# EAGLE board MicroMod-HDMI-Carrier-Panel (EAGLE 9.6.2), part 1 of 3
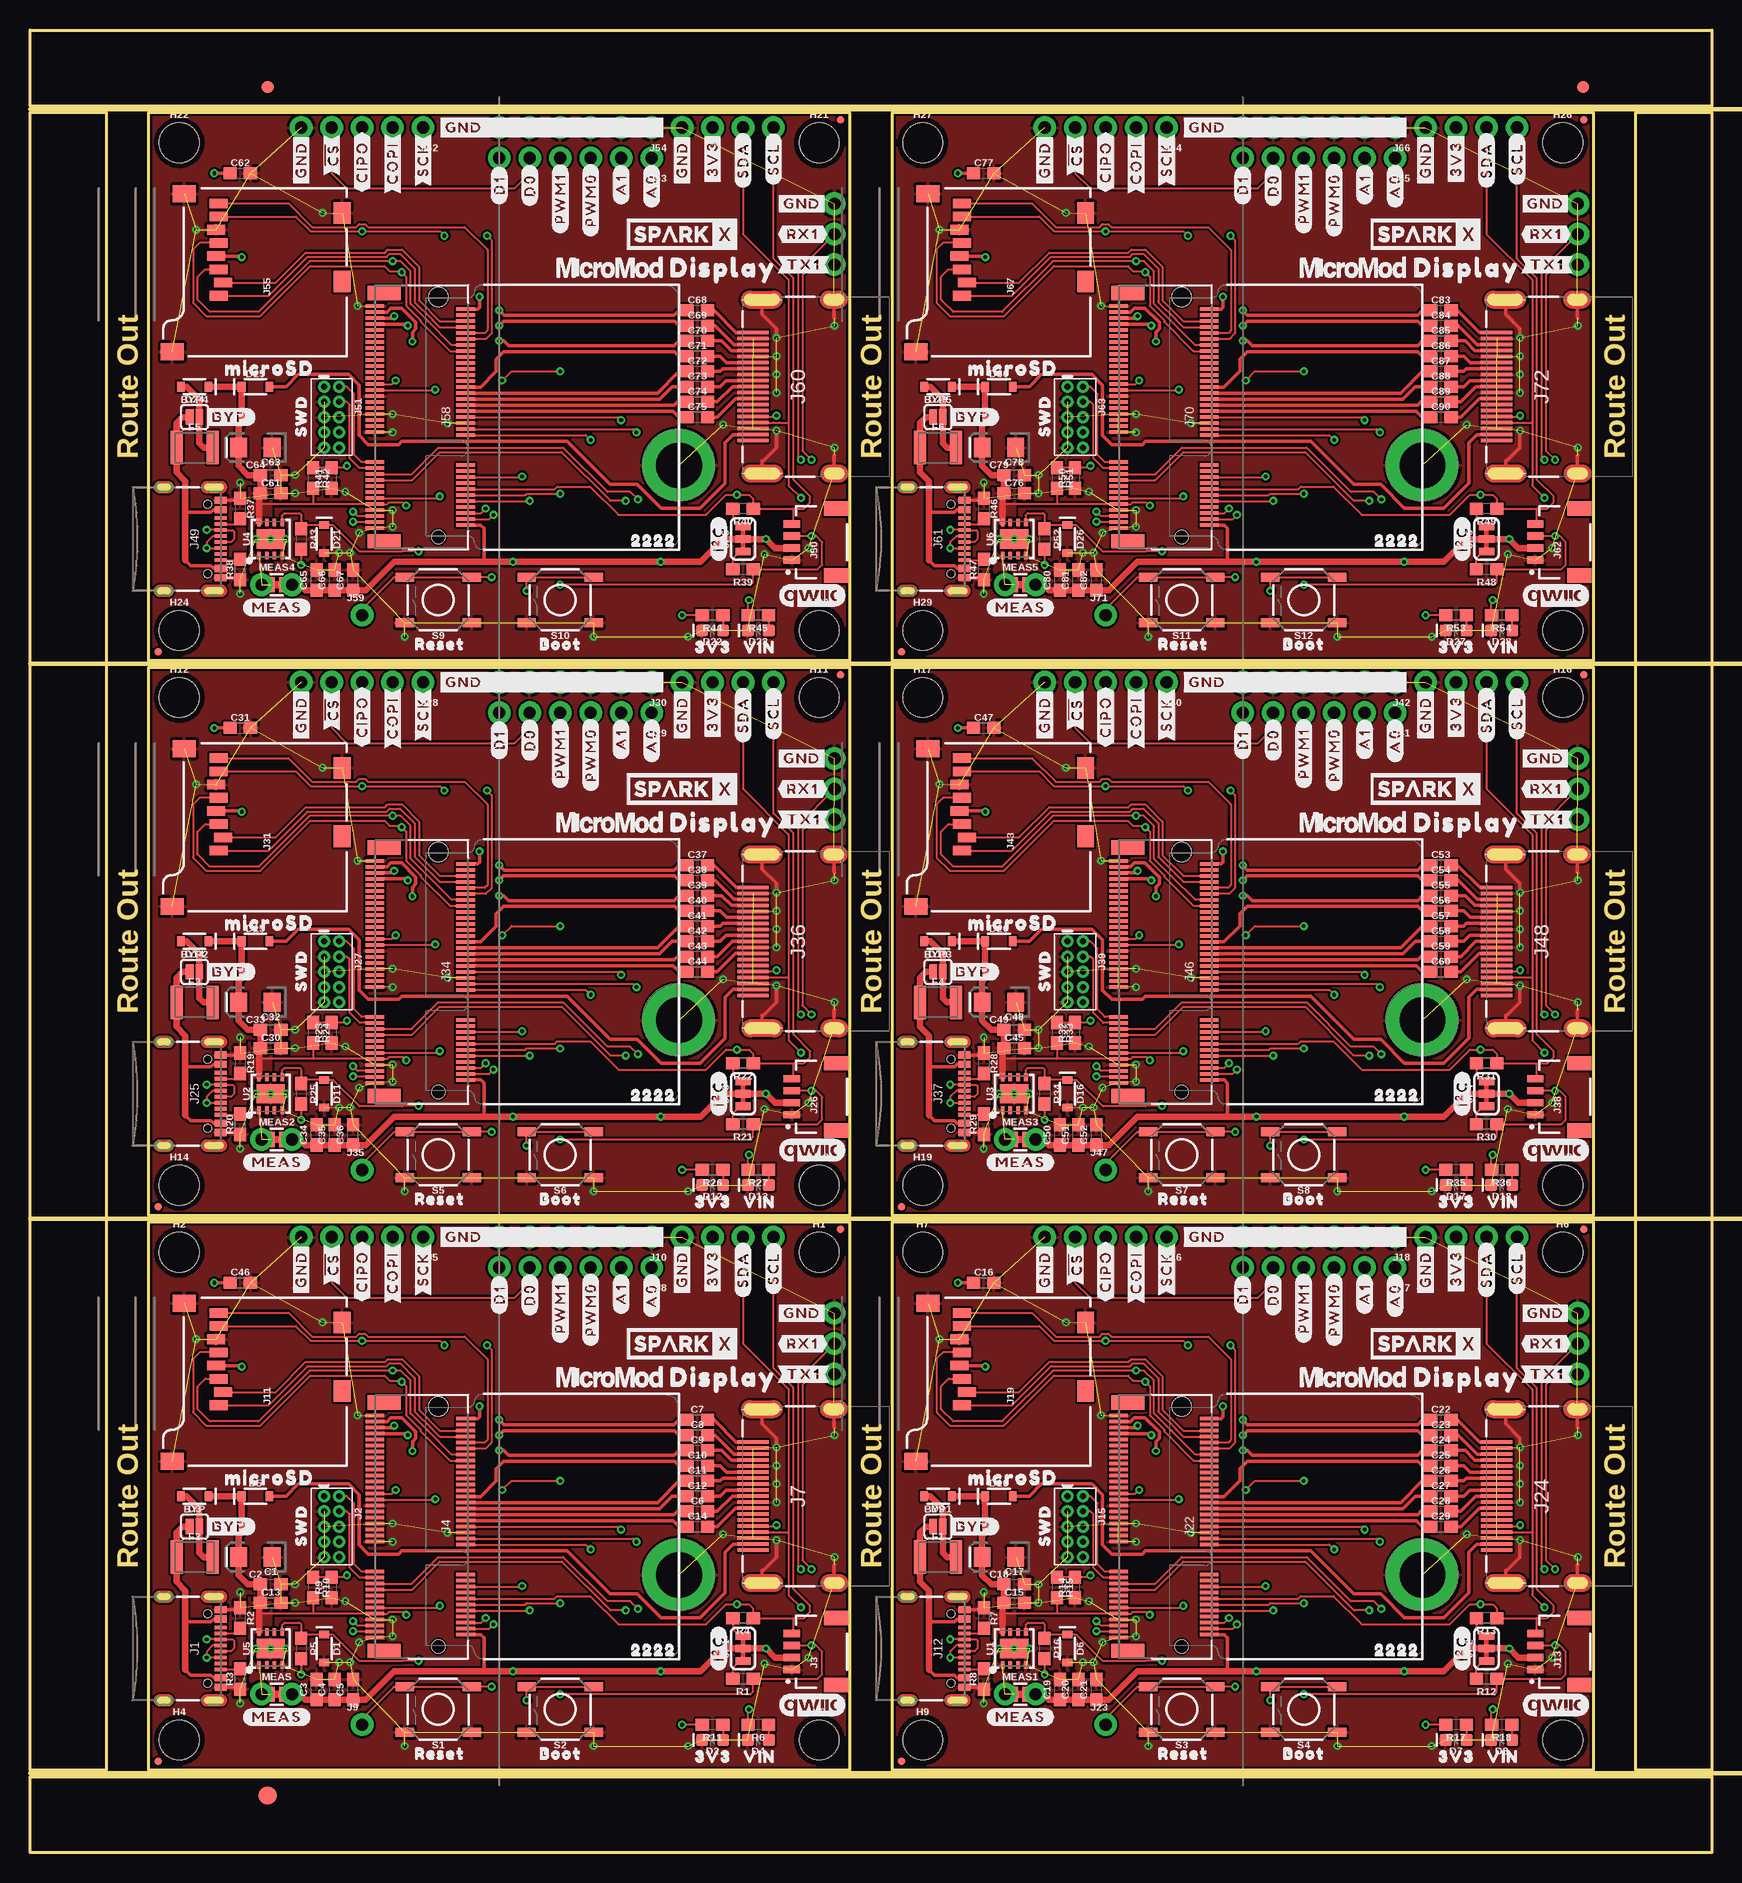
[diagram p0: board, top side]
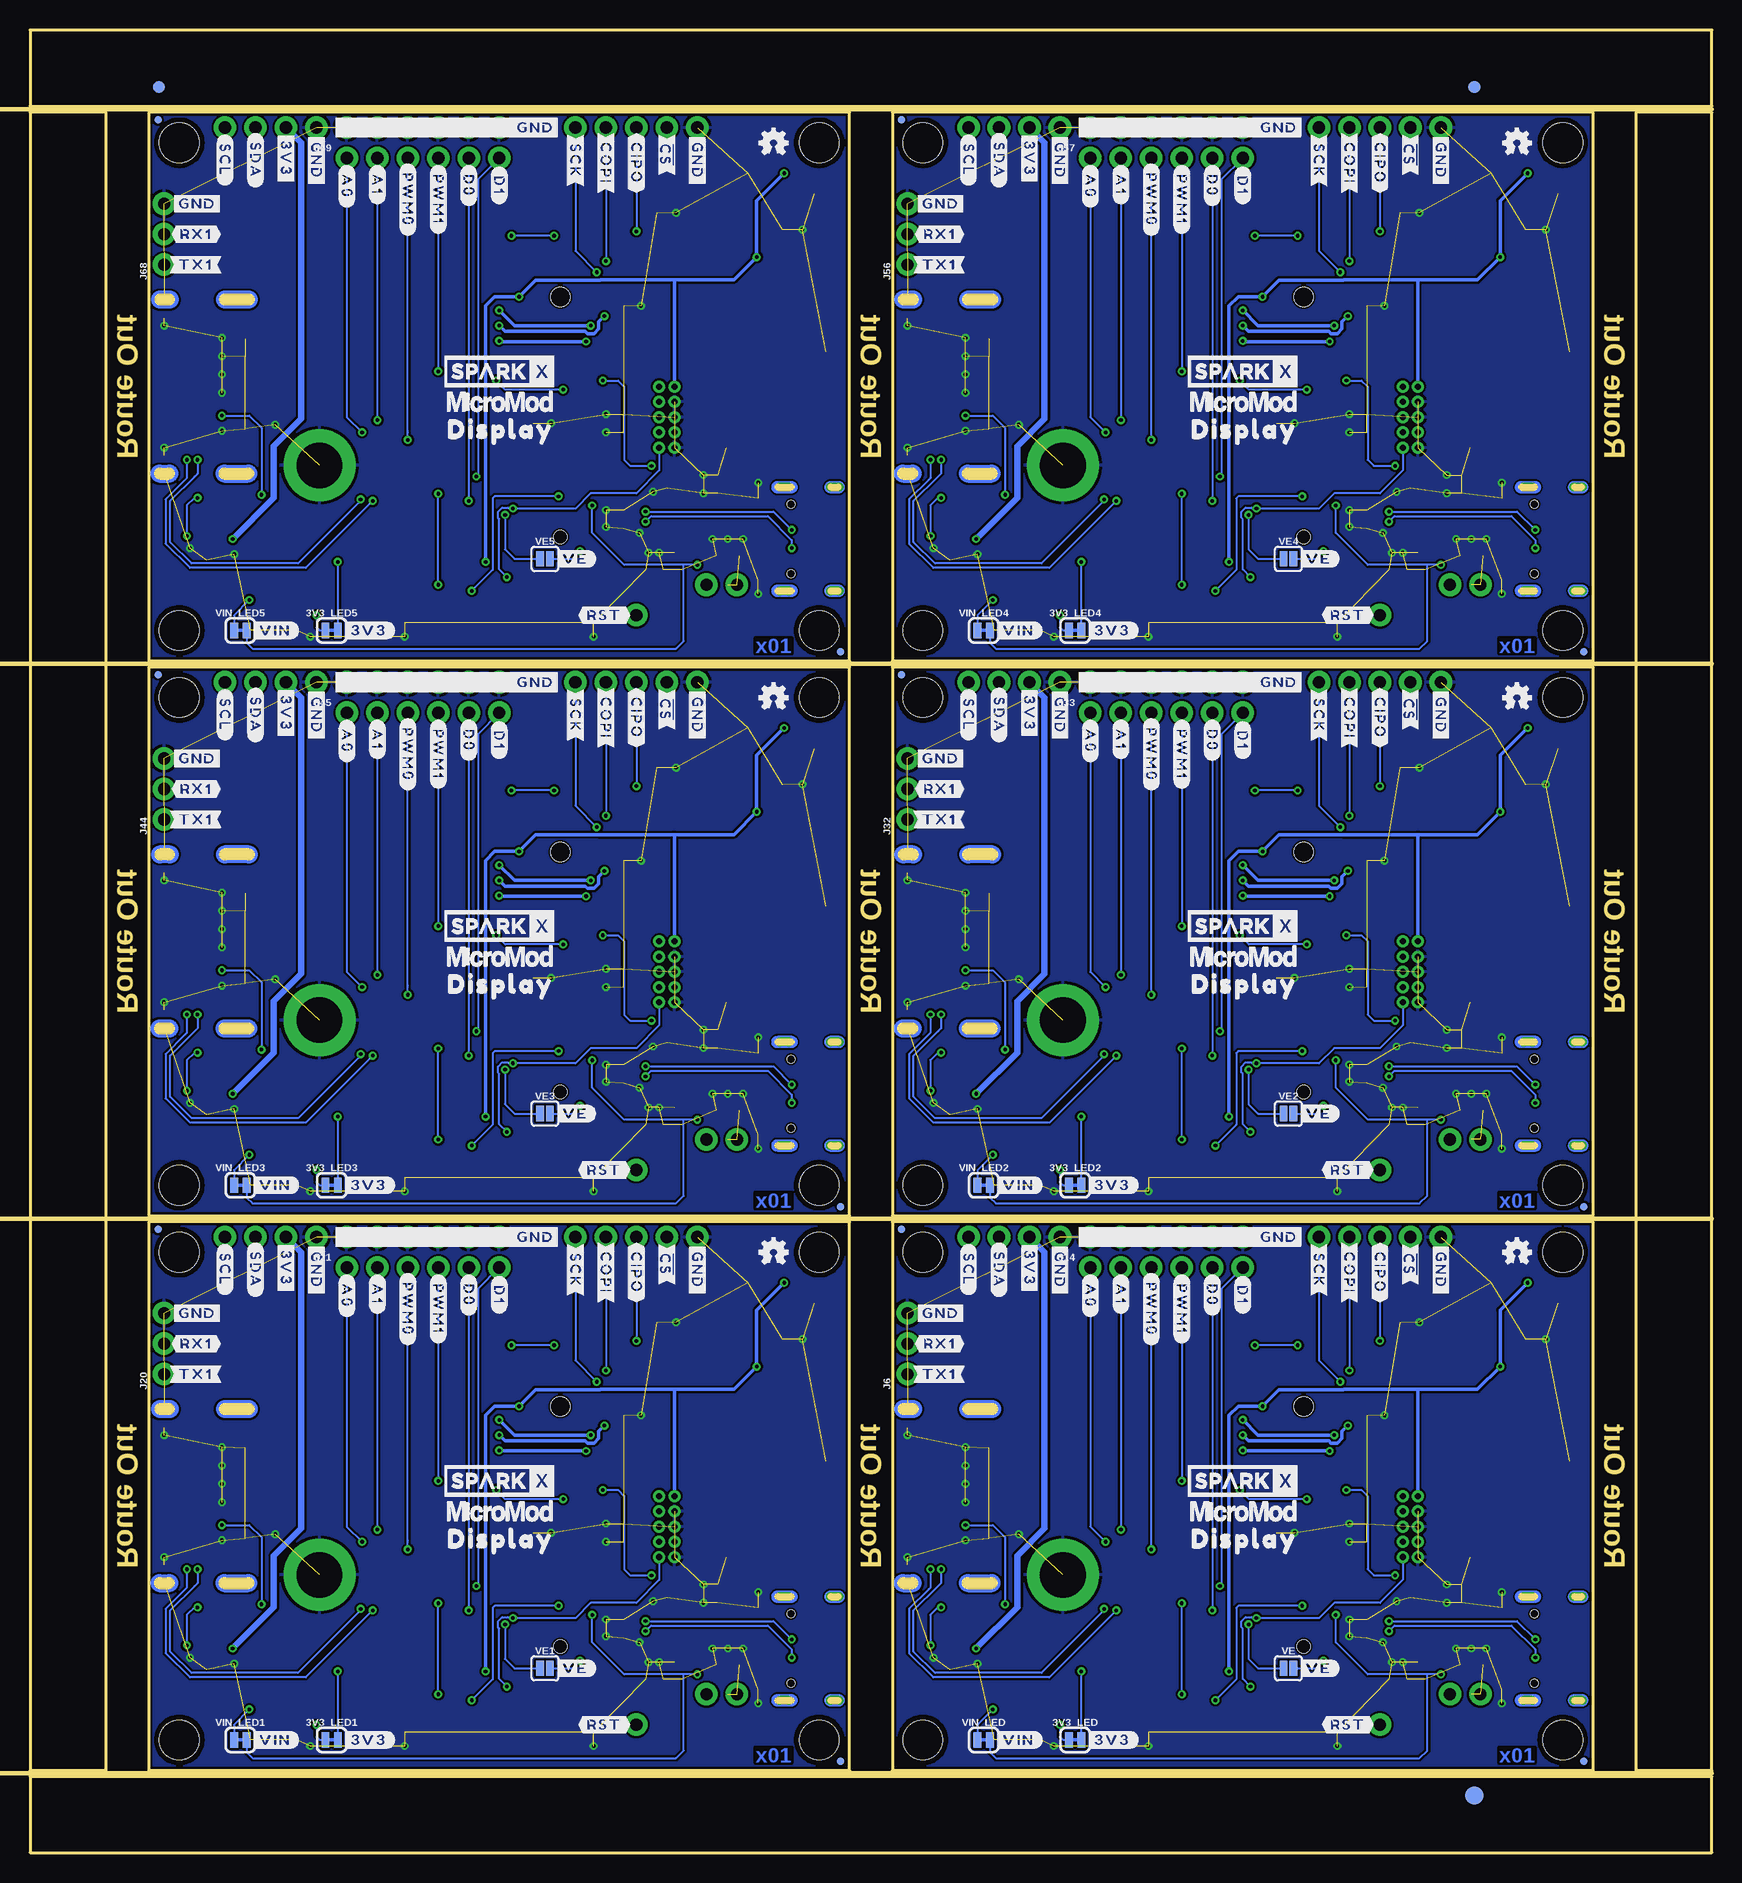
[diagram p1: board, bottom side, seen from below]

Size 140.21 x 151.89 mm. Coordinates in mm from the lower left corner, seen from the top.
Outline: 9.91,6.86 9.91,52.58 68.33,52.58 68.33,6.86 9.91,6.86
Outline: 71.88,6.86 71.88,52.58 130.3,52.58 130.3,6.86 71.88,6.86
Outline: 9.91,53.09 9.91,98.81 68.33,98.81 68.33,53.09 9.91,53.09
Outline: 71.88,53.09 71.88,98.81 130.3,98.81 130.3,53.09 71.88,53.09
Outline: 9.91,99.31 9.91,145.03 68.33,145.03 68.33,99.31 9.91,99.31
Outline: 71.88,99.31 71.88,145.03 130.3,145.03 130.3,99.31 71.88,99.31
Outline: 0,6.35 140.21,6.35 140.21,0 0,0 0,6.35
Outline: 133.86,145.03 140.21,145.03 140.21,6.86 133.86,6.86 133.86,145.03
Outline: 0,151.89 140.21,151.89 140.21,145.54 0,145.54 0,151.89
Outline: 0,145.03 6.35,145.03 6.35,6.86 0,6.86 0,145.03
Copper layers (1*16): Top 0.035mm / dielectric 1.5mm / Bottom 0.035mm
Design rules "MicroMod-HDMI-Carrier": minimum track width 7mil, minimum drill 12mil, track to track 7mil, track to pad 7mil, pad to pad 7mil, via to via 7mil, smd to smd 7mil, copper to edge 7mil, drill to drill 7mil, minimum pad ring 7mil, minimum via ring 7mil, stop-mask expansion 4mil, vias tented up to drill 25mil, thermal gap 10mil
Net classes: 0 default: width 0 mm, drill 0 mm
Milling: 4 lines

## Footprints (pad centres in the part's own frame; a part is rotated, then mirrored left to right if it is on the bottom)
SMT-JUMPER_2_NC_TRACE_SILK = smd 0.66 x 1.27: 1 -0.521,0; 2 0.521,0
SMT-JUMPER_2_NO_SILK = smd 0.635 x 1.27: 1 -0.406,0; 2 0.406,0
0603 = smd 1.1 x 1: 1 -0.85,0; 2 0.85,0
EIA3216 = smd 1.4 x 1.6: + 1.4,0; - -1.4,0
SOD-323 = smd 0.63 x 0.83: A 1.15,0; C -1.15,0
LED-0603 = smd 1 x 1: A -0.877,0; C 0.877,0
FIDUCIAL-1X2 = smd 1 x 1: 1 0,0
FIDUCIAL-1.5X3 = smd 1.5 x 1.5: 1 0,0
1210 = smd 1 x 2.8: 1 -1.5,0; 2 1.5,0
FIDUCIAL-MICRO = smd 0.635 x 0.635: 1 0,0
STAND-OFF = hole 3.302: 0,0
STAND-OFF-REFLOW-M2.5 = drill 3.8 pad 6: 1 0,0
USB-C-16P-2LAYER-PADS = smd 0.3 x 1: A5 -1.25,-0.34; A6 -0.25,-0.34; A7 0.25,-0.34; A8 1.25,-0.34; B5 1.75,-0.34; B6 0.75,-0.34; B7 -0.75,-0.34; B8 -1.75,-0.34 | smd 0.6 x 1: GND -3.225,-0.34; GND2 3.225,-0.34; VBUS1 -2.45,-0.34; VBUS2 2.45,-0.34 | drill 0.4 pad 0.6 long: SHLD1 -4.318,-0.915; SHLD2 4.318,-0.915; SHLD3 -4.318,-5.095; SHLD4 4.318,-5.095 | hole 0.65: -2.89,-1.445; 2.89,-1.445
2X5-PTH-1.27MM = drill 0.508 pad 1: 1 -2.54,-0.635; 2 -2.54,0.635; 3 -1.27,-0.635; 4 -1.27,0.635; 5 0,-0.635; 6 0,0.635; 7 1.27,-0.635; 8 1.27,0.635; 9 2.54,-0.635; 10 2.54,0.635
JST04_1MM_RA = smd 0.6 x 1.35: 1 -1.5,0; 2 -0.5,0; 3 0.5,0; 4 1.5,0 | smd 1.2 x 2: NC1 2.8,-3.675; NC2 -2.8,-3.675
M.2-CONNECTOR-E = smd 0.3 x 1.55: 1 9.25,-5.275; 2 9,2.275; 3 8.75,-5.275; 4 8.5,2.275; 5 8.25,-5.275; 6 8,2.275; 7 7.75,-5.275; 8 7.5,2.275; 9 7.25,-5.275; 10 7,2.275; 11 6.75,-5.275; 12 6.5,2.275; 13 6.25,-5.275; 14 6,2.275; 15 5.75,-5.275; 16 5.5,2.275; 17 5.25,-5.275; 18 5,2.275; 19 4.75,-5.275; 20 4.5,2.275; 21 4.25,-5.275; 22 4,2.275; 23 3.75,-5.275; 32 1.5,2.275; 33 1.25,-5.275; 34 1,2.275; 35 0.75,-5.275; 36 0.5,2.275; 37 0.25,-5.275; 38 0,2.275; 39 -0.25,-5.275; 40 -0.5,2.275; 41 -0.75,-5.275; 42 -1,2.275; 43 -1.25,-5.275; 44 -1.5,2.275; 45 -1.75,-5.275; 46 -2,2.275; 47 -2.25,-5.275; 48 -2.5,2.275; 49 -2.75,-5.275; 50 -3,2.275; 51 -3.25,-5.275; 52 -3.5,2.275; 53 -3.75,-5.275; 54 -4,2.275; 55 -4.25,-5.275; 56 -4.5,2.275; 57 -4.75,-5.275; 58 -5,2.275; 59 -5.25,-5.275; 60 -5.5,2.275; 61 -5.75,-5.275; 62 -6,2.275; 63 -6.25,-5.275; 64 -6.5,2.275; 65 -6.75,-5.275; 66 -7,2.275; 67 -7.25,-5.275; 68 -7.5,2.275; 69 -7.75,-5.275; 70 -8,2.275; 71 -8.25,-5.275; 72 -8.5,2.275; 73 -8.75,-5.275; 74 -9,2.275; 75 -9.25,-5.275 | smd 1.2 x 2.75: A1 10.35,-4.5; A2 -10.35,-4.5 | hole 1.1: 10,0 | hole 1.6: -10,0
1X05_NO_SILK = drill 1.016 pad 1.88: 1 0,0; 2 2.54,0; 3 5.08,0; 4 7.62,0; 5 10.16,0
1X03_NO_SILK = drill 1.016 pad 1.88: 1 0,0; 2 2.54,0; 3 5.08,0
MOLEX_HDMI_208658-1051 = smd 0.3 x 2.6: 1 4.5,4.235; 2 4,4.235; 3 3.5,4.235; 4 3,4.235; 5 2.5,4.235; 6 2,4.235; 7 1.5,4.235; 8 1,4.235; 9 0.5,4.235; 10 0,4.235; 11 -0.5,4.235; 12 -1,4.235; 13 -1.5,4.235; 14 -2,4.235; 15 -2.5,4.235; 16 -3,4.235; 17 -3.5,4.235; 18 -4,4.235; 19 -4.5,4.235 | drill 0.4 long: MH1 -7.25,3.475; MH2 7.25,3.475; MH3 -7.25,-2.485; MH4 7.25,-2.485
1X06_NO_SILK = drill 1.016 pad 1.88: 1 0,0; 2 2.54,0; 3 5.08,0; 4 7.62,0; 5 10.16,0; 6 12.7,0
1X01_NO_SILK = drill 1.016 pad 1.88: 1 0,0
MICRO-SD-SOCKET = smd 1.8 x 1.4: CD1 -2.05,0.4; CD2 -7.75,0.4 | smd 0.8 x 1.5: CS/DAT3 -7.84,10.3; DAT1 -1.24,10.7; DAT2 -8.94,10.7; DI/CMD -6.74,10.7; DO/DAT0 -2.34,10.7; GND -3.44,10.9; SCLK -4.54,10.7; VCC -5.64,10.9 | smd 1.4 x 1.9: GND1 -13.6,14.55; GND3 -0.45,13.55
1X04_NO_SILK = drill 1.016 pad 1.88: 1 0,0; 2 2.54,0; 3 5.08,0; 4 7.62,0
SMT-JUMPER_3_2-NC_TRACE_SILK = smd 0.66 x 1.27: 1 -1.041,0; 2 0,0; 3 1.041,0
COMBO-JUMPER_2_NC_TRACE = smd 0.635 x 1.27: 1 -0.508,0; 2 0.508,0 | drill 1.016 pad 1.88: 3 -1.27,0; 4 1.27,0
TACTILE_SWITCH_SMD_5.2MM = smd 1.524 x 0.762: 1 -2.794,1.905; 2 2.794,1.905; 3 -2.794,-1.905; 4 2.794,-1.905
UDFN-8 = smd 0.3 x 0.65: 1 -0.975,-1.375; 2 -0.325,-1.375; 3 0.325,-1.375; 4 0.975,-1.375; 5 0.975,1.375; 6 0.325,1.375; 7 -0.325,1.375; 8 -0.975,1.375 | smd 2.35 x 1.6: EP 0,0

## Placement (x,y rotation side)
3V3_LED  [SMT-JUMPER_2_NC_TRACE_SILK]  53.09,9.4 0 bottom
3V3_LED1  [SMT-JUMPER_2_NC_TRACE_SILK]  115.06,9.4 0 bottom
3V3_LED2  [SMT-JUMPER_2_NC_TRACE_SILK]  53.09,55.63 0 bottom
3V3_LED3  [SMT-JUMPER_2_NC_TRACE_SILK]  115.06,55.63 0 bottom
3V3_LED4  [SMT-JUMPER_2_NC_TRACE_SILK]  53.09,101.85 0 bottom
3V3_LED5  [SMT-JUMPER_2_NC_TRACE_SILK]  115.06,101.85 0 bottom
BYP  JUMPER-SMT_2_NO_SILK  [SMT-JUMPER_2_NO_SILK]  13.72,27.18 0 top
BYP1  JUMPER-SMT_2_NO_SILK  [SMT-JUMPER_2_NO_SILK]  75.69,27.18 0 top
BYP2  JUMPER-SMT_2_NO_SILK  [SMT-JUMPER_2_NO_SILK]  13.72,73.41 0 top
BYP3  JUMPER-SMT_2_NO_SILK  [SMT-JUMPER_2_NO_SILK]  75.69,73.41 0 top
BYP4  JUMPER-SMT_2_NO_SILK  [SMT-JUMPER_2_NO_SILK]  13.72,119.63 0 top
BYP5  JUMPER-SMT_2_NO_SILK  [SMT-JUMPER_2_NO_SILK]  75.69,119.63 0 top
C1  0.1uF  [0603]  20.07,22.35 0 top
C2  10uF  [EIA3216]  18.8,24.64 180 top
C3  1.0uF  [0603]  23.88,13.59 90 top
C4  0.1uF  [0603]  25.4,13.59 90 top
C5  0.22uF  [0603]  26.92,13.59 90 top
C6  0.1uF  [0603]  55.63,28.45 0 top
C7  0.1uF  [0603]  55.63,36.07 0 top
C8  0.1uF  [0603]  55.63,34.8 0 top
C9  0.1uF  [0603]  55.63,33.53 0 top
C10  0.1uF  [0603]  55.63,32.26 0 top
C11  0.1uF  [0603]  55.63,30.99 0 top
C12  0.1uF  [0603]  55.63,29.72 0 top
C13  0.22uF  [0603]  20.07,20.83 0 top
C14  0.1uF  [0603]  55.63,27.18 0 top
C15  0.22uF  [0603]  82.04,20.83 0 top
C16  0.1uF  [0603]  79.5,47.5 0 top
C17  0.1uF  [0603]  82.04,22.35 0 top
C18  10uF  [EIA3216]  80.77,24.64 180 top
C19  1.0uF  [0603]  85.85,13.59 90 top
C20  0.1uF  [0603]  87.38,13.59 90 top
C21  0.22uF  [0603]  88.9,13.59 90 top
C22  0.1uF  [0603]  117.6,36.07 0 top
C23  0.1uF  [0603]  117.6,34.8 0 top
C24  0.1uF  [0603]  117.6,33.53 0 top
C25  0.1uF  [0603]  117.6,32.26 0 top
C26  0.1uF  [0603]  117.6,30.99 0 top
C27  0.1uF  [0603]  117.6,29.72 0 top
C28  0.1uF  [0603]  117.6,28.45 0 top
C29  0.1uF  [0603]  117.6,27.18 0 top
C30  0.22uF  [0603]  20.07,67.06 0 top
C31  0.1uF  [0603]  17.53,93.73 0 top
C32  0.1uF  [0603]  20.07,68.58 0 top
C33  10uF  [EIA3216]  18.8,70.87 180 top
C34  1.0uF  [0603]  23.88,59.82 90 top
C35  0.1uF  [0603]  25.4,59.82 90 top
C36  0.22uF  [0603]  26.92,59.82 90 top
C37  0.1uF  [0603]  55.63,82.3 0 top
C38  0.1uF  [0603]  55.63,81.03 0 top
C39  0.1uF  [0603]  55.63,79.76 0 top
C40  0.1uF  [0603]  55.63,78.49 0 top
C41  0.1uF  [0603]  55.63,77.22 0 top
C42  0.1uF  [0603]  55.63,75.95 0 top
C43  0.1uF  [0603]  55.63,74.68 0 top
C44  0.1uF  [0603]  55.63,73.41 0 top
C45  0.22uF  [0603]  82.04,67.06 0 top
C46  0.1uF  [0603]  17.53,47.5 0 top
C47  0.1uF  [0603]  79.5,93.73 0 top
C48  0.1uF  [0603]  82.04,68.58 0 top
C49  10uF  [EIA3216]  80.77,70.87 180 top
C50  1.0uF  [0603]  85.85,59.82 90 top
C51  0.1uF  [0603]  87.38,59.82 90 top
C52  0.22uF  [0603]  88.9,59.82 90 top
C53  0.1uF  [0603]  117.6,82.3 0 top
C54  0.1uF  [0603]  117.6,81.03 0 top
C55  0.1uF  [0603]  117.6,79.76 0 top
C56  0.1uF  [0603]  117.6,78.49 0 top
C57  0.1uF  [0603]  117.6,77.22 0 top
C58  0.1uF  [0603]  117.6,75.95 0 top
C59  0.1uF  [0603]  117.6,74.68 0 top
C60  0.1uF  [0603]  117.6,73.41 0 top
C61  0.22uF  [0603]  20.07,113.28 0 top
C62  0.1uF  [0603]  17.53,139.95 0 top
C63  0.1uF  [0603]  20.07,114.81 0 top
C64  10uF  [EIA3216]  18.8,117.09 180 top
C65  1.0uF  [0603]  23.88,106.05 90 top
C66  0.1uF  [0603]  25.4,106.05 90 top
C67  0.22uF  [0603]  26.92,106.05 90 top
C68  0.1uF  [0603]  55.63,128.52 0 top
C69  0.1uF  [0603]  55.63,127.25 0 top
C70  0.1uF  [0603]  55.63,125.98 0 top
C71  0.1uF  [0603]  55.63,124.71 0 top
C72  0.1uF  [0603]  55.63,123.44 0 top
C73  0.1uF  [0603]  55.63,122.17 0 top
C74  0.1uF  [0603]  55.63,120.9 0 top
C75  0.1uF  [0603]  55.63,119.63 0 top
C76  0.22uF  [0603]  82.04,113.28 0 top
C77  0.1uF  [0603]  79.5,139.95 0 top
C78  0.1uF  [0603]  82.04,114.81 0 top
C79  10uF  [EIA3216]  80.77,117.09 180 top
C80  1.0uF  [0603]  85.85,106.05 90 top
C81  0.1uF  [0603]  87.38,106.05 90 top
C82  0.22uF  [0603]  88.9,106.05 90 top
C83  0.1uF  [0603]  117.6,128.52 0 top
C84  0.1uF  [0603]  117.6,127.25 0 top
C85  0.1uF  [0603]  117.6,125.98 0 top
C86  0.1uF  [0603]  117.6,124.71 0 top
C87  0.1uF  [0603]  117.6,123.44 0 top
C88  0.1uF  [0603]  117.6,122.17 0 top
C89  0.1uF  [0603]  117.6,120.9 0 top
C90  0.1uF  [0603]  117.6,119.63 0 top
D1  3.3V  [SOD-323]  24.51,17.02 270 top
D2  RED  [LED-0603]  56.9,9.4 180 top
D3  3A/10V/280mV  [SOD-323]  13.72,29.72 180 top
D4  Yellow  [LED-0603]  60.71,9.4 180 top
D5  3A/10V/280mV  [SOD-323]  18.8,29.72 0 top
D6  3.3V  [SOD-323]  86.49,17.02 270 top
D7  RED  [LED-0603]  118.87,9.4 180 top
D8  Yellow  [LED-0603]  122.68,9.4 180 top
D9  3A/10V/280mV  [SOD-323]  75.69,29.72 180 top
D10  3A/10V/280mV  [SOD-323]  80.77,29.72 0 top
D11  3.3V  [SOD-323]  24.51,63.25 270 top
D12  RED  [LED-0603]  56.9,55.63 180 top
D13  Yellow  [LED-0603]  60.71,55.63 180 top
D14  3A/10V/280mV  [SOD-323]  13.72,75.95 180 top
D15  3A/10V/280mV  [SOD-323]  18.8,75.95 0 top
D16  3.3V  [SOD-323]  86.49,63.25 270 top
D17  RED  [LED-0603]  118.87,55.63 180 top
D18  Yellow  [LED-0603]  122.68,55.63 180 top
D19  3A/10V/280mV  [SOD-323]  75.69,75.95 180 top
D20  3A/10V/280mV  [SOD-323]  80.77,75.95 0 top
D21  3.3V  [SOD-323]  24.51,109.47 270 top
D22  RED  [LED-0603]  56.9,101.85 180 top
D23  Yellow  [LED-0603]  60.71,101.85 180 top
D24  3A/10V/280mV  [SOD-323]  13.72,122.17 180 top
D25  3A/10V/280mV  [SOD-323]  18.8,122.17 0 top
D26  3.3V  [SOD-323]  86.49,109.47 270 top
D27  RED  [LED-0603]  118.87,101.85 180 top
D28  Yellow  [LED-0603]  122.68,101.85 180 top
D29  3A/10V/280mV  [SOD-323]  75.69,122.17 180 top
D30  3A/10V/280mV  [SOD-323]  80.77,122.17 0 top
E$1  [FIDUCIAL-1X2]  19.81,147.13 0 top
E$2  [FIDUCIAL-1X2]  19.81,147.13 0 bottom
E$3  [FIDUCIAL-1X2]  129.48,147.13 0 top
E$4  [FIDUCIAL-1X2]  129.48,147.13 0 bottom
E$5  [FIDUCIAL-1.5X3]  19.81,4.76 0 top
E$6  [FIDUCIAL-1.5X3]  19.81,4.76 0 bottom
F1  6V/2A  [1210]  75.69,24.64 0 top
F2  6V/2A  [1210]  13.72,24.64 0 top
F3  6V/2A  [1210]  13.72,70.87 0 top
F4  6V/2A  [1210]  75.69,70.87 0 top
F5  6V/2A  [1210]  13.72,117.09 0 top
F6  6V/2A  [1210]  75.69,117.09 0 top
FD1  FIDUCIALUFIDUCIAL  [FIDUCIAL-MICRO]  10.67,7.62 0 top
FD2  FIDUCIALUFIDUCIAL  [FIDUCIAL-MICRO]  67.56,51.94 0 top
FD3  FIDUCIALUFIDUCIAL  [FIDUCIAL-MICRO]  10.67,7.62 0 bottom
FD4  FIDUCIALUFIDUCIAL  [FIDUCIAL-MICRO]  67.56,51.94 0 bottom
FD5  FIDUCIALUFIDUCIAL  [FIDUCIAL-MICRO]  72.64,7.62 0 top
FD6  FIDUCIALUFIDUCIAL  [FIDUCIAL-MICRO]  129.54,51.94 0 top
FD7  FIDUCIALUFIDUCIAL  [FIDUCIAL-MICRO]  72.64,7.62 0 bottom
FD8  FIDUCIALUFIDUCIAL  [FIDUCIAL-MICRO]  129.54,51.94 0 bottom
FD9  FIDUCIALUFIDUCIAL  [FIDUCIAL-MICRO]  10.67,53.85 0 top
FD10  FIDUCIALUFIDUCIAL  [FIDUCIAL-MICRO]  67.56,98.17 0 top
FD11  FIDUCIALUFIDUCIAL  [FIDUCIAL-MICRO]  10.67,53.85 0 bottom
FD12  FIDUCIALUFIDUCIAL  [FIDUCIAL-MICRO]  67.56,98.17 0 bottom
FD13  FIDUCIALUFIDUCIAL  [FIDUCIAL-MICRO]  72.64,53.85 0 top
FD14  FIDUCIALUFIDUCIAL  [FIDUCIAL-MICRO]  129.54,98.17 0 top
FD15  FIDUCIALUFIDUCIAL  [FIDUCIAL-MICRO]  72.64,53.85 0 bottom
FD16  FIDUCIALUFIDUCIAL  [FIDUCIAL-MICRO]  129.54,98.17 0 bottom
FD17  FIDUCIALUFIDUCIAL  [FIDUCIAL-MICRO]  10.67,100.08 0 top
FD18  FIDUCIALUFIDUCIAL  [FIDUCIAL-MICRO]  67.56,144.4 0 top
FD19  FIDUCIALUFIDUCIAL  [FIDUCIAL-MICRO]  10.67,100.08 0 bottom
FD20  FIDUCIALUFIDUCIAL  [FIDUCIAL-MICRO]  67.56,144.4 0 bottom
FD21  FIDUCIALUFIDUCIAL  [FIDUCIAL-MICRO]  72.64,100.08 0 top
FD22  FIDUCIALUFIDUCIAL  [FIDUCIAL-MICRO]  129.54,144.4 0 top
FD23  FIDUCIALUFIDUCIAL  [FIDUCIAL-MICRO]  72.64,100.08 0 bottom
FD24  FIDUCIALUFIDUCIAL  [FIDUCIAL-MICRO]  129.54,144.4 0 bottom
H1  STAND-OFF  [STAND-OFF]  65.79,50.04 0 top
H2  STAND-OFF  [STAND-OFF]  12.45,50.04 0 top
H3  STAND-OFF  [STAND-OFF]  65.79,9.4 0 top
H4  STAND-OFF  [STAND-OFF]  12.45,9.4 0 top
H5  STAND-OFF-REFLOW2.5MM_TALL  [STAND-OFF-REFLOW-M2.5]  54.11,23.16 0 top
H6  STAND-OFF  [STAND-OFF]  127.76,50.04 0 top
H7  STAND-OFF  [STAND-OFF]  74.42,50.04 0 top
H8  STAND-OFF  [STAND-OFF]  127.76,9.4 0 top
H9  STAND-OFF  [STAND-OFF]  74.42,9.4 0 top
H10  STAND-OFF-REFLOW2.5MM_TALL  [STAND-OFF-REFLOW-M2.5]  116.08,23.16 0 top
H11  STAND-OFF  [STAND-OFF]  65.79,96.27 0 top
H12  STAND-OFF  [STAND-OFF]  12.45,96.27 0 top
H13  STAND-OFF  [STAND-OFF]  65.79,55.63 0 top
H14  STAND-OFF  [STAND-OFF]  12.45,55.63 0 top
H15  STAND-OFF-REFLOW2.5MM_TALL  [STAND-OFF-REFLOW-M2.5]  54.11,69.39 0 top
H16  STAND-OFF  [STAND-OFF]  127.76,96.27 0 top
H17  STAND-OFF  [STAND-OFF]  74.42,96.27 0 top
H18  STAND-OFF  [STAND-OFF]  127.76,55.63 0 top
H19  STAND-OFF  [STAND-OFF]  74.42,55.63 0 top
H20  STAND-OFF-REFLOW2.5MM_TALL  [STAND-OFF-REFLOW-M2.5]  116.08,69.39 0 top
H21  STAND-OFF  [STAND-OFF]  65.79,142.49 0 top
H22  STAND-OFF  [STAND-OFF]  12.45,142.49 0 top
H23  STAND-OFF  [STAND-OFF]  65.79,101.85 0 top
H24  STAND-OFF  [STAND-OFF]  12.45,101.85 0 top
H25  STAND-OFF-REFLOW2.5MM_TALL  [STAND-OFF-REFLOW-M2.5]  54.11,115.61 0 top
H26  STAND-OFF  [STAND-OFF]  127.76,142.49 0 top
H27  STAND-OFF  [STAND-OFF]  74.42,142.49 0 top
H28  STAND-OFF  [STAND-OFF]  127.76,101.85 0 top
H29  STAND-OFF  [STAND-OFF]  74.42,101.85 0 top
H30  STAND-OFF-REFLOW2.5MM_TALL  [STAND-OFF-REFLOW-M2.5]  116.08,115.61 0 top
J1  [USB-C-16P-2LAYER-PADS]  16.26,17.02 270 top
J2  JTAG  [2X5-PTH-1.27MM]  25.15,27.18 270 top
J3  Qwiic  [JST04_1MM_RA]  63.5,16.76 90 top
J4  MICROMOD-2222-C  [M.2-CONNECTOR-E]  34.04,27.18 270 top
J5  SPI  [1X05_NO_SILK]  32.77,51.31 180 top
J6  UART  [1X03_NO_SILK]  67.06,39.88 90 bottom
J7  HDMI  [MOLEX_HDMI_208658-1051]  64.52,29.72 90 top
J8  Dedicated  [1X06_NO_SILK]  51.82,48.77 180 top
J9  [1X01_NO_SILK]  27.69,10.67 0 top
J10  [1X06_NO_SILK]  51.82,51.31 180 top
J11  microSD  [MICRO-SD-SOCKET]  26.42,46.23 90 top
J12  [USB-C-16P-2LAYER-PADS]  78.23,17.02 270 top
J13  Qwiic  [JST04_1MM_RA]  125.48,16.76 90 top
J14  [1X04_NO_SILK]  54.36,51.31 180 bottom
J15  JTAG  [2X5-PTH-1.27MM]  87.12,27.18 270 top
J16  SPI  [1X05_NO_SILK]  94.74,51.31 180 top
J17  Dedicated  [1X06_NO_SILK]  113.79,48.77 180 top
J18  [1X06_NO_SILK]  113.79,51.31 180 top
J19  microSD  [MICRO-SD-SOCKET]  88.39,46.23 90 top
J20  UART  [1X03_NO_SILK]  129.03,39.88 90 bottom
J21  [1X04_NO_SILK]  116.33,51.31 180 bottom
J22  MICROMOD-2222-C  [M.2-CONNECTOR-E]  96.01,27.18 270 top
J23  [1X01_NO_SILK]  89.66,10.67 0 top
J24  HDMI  [MOLEX_HDMI_208658-1051]  126.49,29.72 90 top
J25  [USB-C-16P-2LAYER-PADS]  16.26,63.25 270 top
J26  Qwiic  [JST04_1MM_RA]  63.5,62.99 90 top
J27  JTAG  [2X5-PTH-1.27MM]  25.15,73.41 270 top
J28  SPI  [1X05_NO_SILK]  32.77,97.54 180 top
J29  Dedicated  [1X06_NO_SILK]  51.82,95 180 top
J30  [1X06_NO_SILK]  51.82,97.54 180 top
J31  microSD  [MICRO-SD-SOCKET]  26.42,92.46 90 top
J32  UART  [1X03_NO_SILK]  67.06,86.11 90 bottom
J33  [1X04_NO_SILK]  54.36,97.54 180 bottom
J34  MICROMOD-2222-C  [M.2-CONNECTOR-E]  34.04,73.41 270 top
J35  [1X01_NO_SILK]  27.69,56.9 0 top
J36  HDMI  [MOLEX_HDMI_208658-1051]  64.52,75.95 90 top
J37  [USB-C-16P-2LAYER-PADS]  78.23,63.25 270 top
J38  Qwiic  [JST04_1MM_RA]  125.48,62.99 90 top
J39  JTAG  [2X5-PTH-1.27MM]  87.12,73.41 270 top
J40  SPI  [1X05_NO_SILK]  94.74,97.54 180 top
J41  Dedicated  [1X06_NO_SILK]  113.79,95 180 top
J42  [1X06_NO_SILK]  113.79,97.54 180 top
J43  microSD  [MICRO-SD-SOCKET]  88.39,92.46 90 top
J44  UART  [1X03_NO_SILK]  129.03,86.11 90 bottom
J45  [1X04_NO_SILK]  116.33,97.54 180 bottom
J46  MICROMOD-2222-C  [M.2-CONNECTOR-E]  96.01,73.41 270 top
J47  [1X01_NO_SILK]  89.66,56.9 0 top
J48  HDMI  [MOLEX_HDMI_208658-1051]  126.49,75.95 90 top
J49  [USB-C-16P-2LAYER-PADS]  16.26,109.47 270 top
J50  Qwiic  [JST04_1MM_RA]  63.5,109.22 90 top
J51  JTAG  [2X5-PTH-1.27MM]  25.15,119.63 270 top
J52  SPI  [1X05_NO_SILK]  32.77,143.76 180 top
J53  Dedicated  [1X06_NO_SILK]  51.82,141.22 180 top
J54  [1X06_NO_SILK]  51.82,143.76 180 top
J55  microSD  [MICRO-SD-SOCKET]  26.42,138.68 90 top
J56  UART  [1X03_NO_SILK]  67.06,132.33 90 bottom
J57  [1X04_NO_SILK]  54.36,143.76 180 bottom
J58  MICROMOD-2222-C  [M.2-CONNECTOR-E]  34.04,119.63 270 top
J59  [1X01_NO_SILK]  27.69,103.12 0 top
J60  HDMI  [MOLEX_HDMI_208658-1051]  64.52,122.17 90 top
J61  [USB-C-16P-2LAYER-PADS]  78.23,109.47 270 top
J62  Qwiic  [JST04_1MM_RA]  125.48,109.22 90 top
J63  JTAG  [2X5-PTH-1.27MM]  87.12,119.63 270 top
J64  SPI  [1X05_NO_SILK]  94.74,143.76 180 top
J65  Dedicated  [1X06_NO_SILK]  113.79,141.22 180 top
J66  [1X06_NO_SILK]  113.79,143.76 180 top
J67  microSD  [MICRO-SD-SOCKET]  88.39,138.68 90 top
J68  UART  [1X03_NO_SILK]  129.03,132.33 90 bottom
J69  [1X04_NO_SILK]  116.33,143.76 180 bottom
J70  MICROMOD-2222-C  [M.2-CONNECTOR-E]  96.01,119.63 270 top
J71  [1X01_NO_SILK]  89.66,103.12 0 top
J72  HDMI  [MOLEX_HDMI_208658-1051]  126.49,122.17 90 top
JP1  [SMT-JUMPER_3_2-NC_TRACE_SILK]  59.44,17.02 90 top
JP2  [SMT-JUMPER_3_2-NC_TRACE_SILK]  121.41,17.02 90 top
JP3  [SMT-JUMPER_3_2-NC_TRACE_SILK]  59.44,63.25 90 top
JP4  [SMT-JUMPER_3_2-NC_TRACE_SILK]  121.41,63.25 90 top
JP5  [SMT-JUMPER_3_2-NC_TRACE_SILK]  59.44,109.47 90 top
JP6  [SMT-JUMPER_3_2-NC_TRACE_SILK]  121.41,109.47 90 top
LOGO1  QWIIC_LOGO_CONNECTOR  [QWIIC_5.5MM]  127.19,12.32 0 top
LOGO2  QWIIC_LOGO_CONNECTOR  [QWIIC_5.5MM]  65.21,12.32 0 top
LOGO3  OSHW-LOGOMINI  [OSHW-LOGO-MINI]  16.26,50.04 0 bottom
LOGO4  OSHW-LOGOMINI  [OSHW-LOGO-MINI]  78.23,50.04 0 bottom
LOGO5  QWIIC_LOGO_CONNECTOR  [QWIIC_5.5MM]  65.21,58.55 0 top
LOGO6  OSHW-LOGOMINI  [OSHW-LOGO-MINI]  16.26,96.27 0 bottom
LOGO7  QWIIC_LOGO_CONNECTOR  [QWIIC_5.5MM]  127.19,58.55 0 top
LOGO8  OSHW-LOGOMINI  [OSHW-LOGO-MINI]  78.23,96.27 0 bottom
LOGO9  QWIIC_LOGO_CONNECTOR  [QWIIC_5.5MM]  65.21,104.78 0 top
LOGO10  OSHW-LOGOMINI  [OSHW-LOGO-MINI]  16.26,142.49 0 bottom
LOGO11  QWIIC_LOGO_CONNECTOR  [QWIIC_5.5MM]  127.19,104.78 0 top
LOGO12  OSHW-LOGOMINI  [OSHW-LOGO-MINI]  78.23,142.49 0 bottom
MEAS  [COMBO-JUMPER_2_NC_TRACE]  20.57,13.21 0 top
MEAS1  [COMBO-JUMPER_2_NC_TRACE]  82.55,13.21 0 top
MEAS2  [COMBO-JUMPER_2_NC_TRACE]  20.57,59.44 0 top
MEAS3  [COMBO-JUMPER_2_NC_TRACE]  82.55,59.44 0 top
MEAS4  [COMBO-JUMPER_2_NC_TRACE]  20.57,105.66 0 top
MEAS5  [COMBO-JUMPER_2_NC_TRACE]  82.55,105.66 0 top
R1  2.2k  [0603]  59.44,14.48 180 top
R2  5.1k  [0603]  17.53,19.56 270 top
R3  5.1k  [0603]  17.53,14.48 90 top
R4  2.2k  [0603]  59.44,19.56 180 top
R5  100k  [0603]  22.61,17.02 270 top
R6  4.7k  [0603]  60.71,10.67 180 top
R7  5.1k  [0603]  79.5,19.56 270 top
R8  5.1k  [0603]  79.5,14.48 90 top
R9  10k  [0603]  25.15,22.1 90 top
R10  20k  [0603]  23.62,22.1 270 top
R11  1k  [0603]  56.9,10.67 180 top
R12  2.2k  [0603]  121.41,14.48 180 top
R13  2.2k  [0603]  121.41,19.56 180 top
R14  10k  [0603]  87.12,22.1 90 top
R15  20k  [0603]  85.6,22.1 270 top
R16  100k  [0603]  84.58,17.02 270 top
R17  1k  [0603]  118.87,10.67 180 top
R18  4.7k  [0603]  122.68,10.67 180 top
R19  5.1k  [0603]  17.53,65.79 270 top
R20  5.1k  [0603]  17.53,60.71 90 top
R21  2.2k  [0603]  59.44,60.71 180 top
R22  2.2k  [0603]  59.44,65.79 180 top
R23  10k  [0603]  25.15,68.33 90 top
R24  20k  [0603]  23.62,68.33 270 top
R25  100k  [0603]  22.61,63.25 270 top
R26  1k  [0603]  56.9,56.9 180 top
R27  4.7k  [0603]  60.71,56.9 180 top
R28  5.1k  [0603]  79.5,65.79 270 top
R29  5.1k  [0603]  79.5,60.71 90 top
R30  2.2k  [0603]  121.41,60.71 180 top
R31  2.2k  [0603]  121.41,65.79 180 top
R32  10k  [0603]  87.12,68.33 90 top
R33  20k  [0603]  85.6,68.33 270 top
R34  100k  [0603]  84.58,63.25 270 top
R35  1k  [0603]  118.87,56.9 180 top
R36  4.7k  [0603]  122.68,56.9 180 top
R37  5.1k  [0603]  17.53,112.01 270 top
R38  5.1k  [0603]  17.53,106.93 90 top
R39  2.2k  [0603]  59.44,106.93 180 top
R40  2.2k  [0603]  59.44,112.01 180 top
R41  10k  [0603]  25.15,114.55 90 top
R42  20k  [0603]  23.62,114.55 270 top
R43  100k  [0603]  22.61,109.47 270 top
R44  1k  [0603]  56.9,103.12 180 top
R45  4.7k  [0603]  60.71,103.12 180 top
R46  5.1k  [0603]  79.5,112.01 270 top
R47  5.1k  [0603]  79.5,106.93 90 top
R48  2.2k  [0603]  121.41,106.93 180 top
R49  2.2k  [0603]  121.41,112.01 180 top
R50  10k  [0603]  87.12,114.55 90 top
R51  20k  [0603]  85.6,114.55 270 top
R52  100k  [0603]  84.58,109.47 270 top
R53  1k  [0603]  118.87,103.12 180 top
R54  4.7k  [0603]  122.68,103.12 180 top
S1  Reset  [TACTILE_SWITCH_SMD_5.2MM]  34.04,11.94 180 top
S2  BOOT  [TACTILE_SWITCH_SMD_5.2MM]  44.2,11.94 180 top
S3  Reset  [TACTILE_SWITCH_SMD_5.2MM]  96.01,11.94 180 top
S4  BOOT  [TACTILE_SWITCH_SMD_5.2MM]  106.17,11.94 180 top
S5  Reset  [TACTILE_SWITCH_SMD_5.2MM]  34.04,58.17 180 top
S6  BOOT  [TACTILE_SWITCH_SMD_5.2MM]  44.2,58.17 180 top
S7  Reset  [TACTILE_SWITCH_SMD_5.2MM]  96.01,58.17 180 top
S8  BOOT  [TACTILE_SWITCH_SMD_5.2MM]  106.17,58.17 180 top
S9  Reset  [TACTILE_SWITCH_SMD_5.2MM]  34.04,104.39 180 top
S10  BOOT  [TACTILE_SWITCH_SMD_5.2MM]  44.2,104.39 180 top
S11  Reset  [TACTILE_SWITCH_SMD_5.2MM]  96.01,104.39 180 top
S12  BOOT  [TACTILE_SWITCH_SMD_5.2MM]  106.17,104.39 180 top
U1  AP7361C-33FGE  [UDFN-8]  82.04,17.02 0 top
U2  AP7361C-33FGE  [UDFN-8]  20.07,63.25 0 top
U3  AP7361C-33FGE  [UDFN-8]  82.04,63.25 0 top
U4  AP7361C-33FGE  [UDFN-8]  20.07,109.47 0 top
U5  AP7361C-33FGE  [UDFN-8]  20.07,17.02 0 top
U6  AP7361C-33FGE  [UDFN-8]  82.04,109.47 0 top
U$1  SPARKX-LOGO4  [SPARKX-MEDIUM]  54.36,42.42 0 top
U$2  [MICROSD0]  19.94,31.24 0 top
U$3  [DISPLAY0]  57.78,39.62 0 top
U$4  [#3V3#0]  52.2,9.4 0 bottom
U$5  [DISPLAY0]  38.99,26.16 0 bottom
U$6  [#A0#5]  51.82,44.7 90 top
U$7  [#A0#5]  51.82,48.13 270 bottom
U$8  [#A1#4]  49.28,44.96 90 top
U$9  [#A1#4]  49.28,48.13 270 bottom
U$10  [#D0#1]  41.66,48.13 270 bottom
U$11  [#GND#0]  33.91,51.31 0 top
U$12  [#GND#0]  38.35,51.31 0 bottom
U$13  [#3V3#1]  56.9,46.48 90 top
U$14  [#3V3#1]  56.9,50.93 270 bottom
U$15  [#GND#0]  54.36,46.35 90 top
U$16  [#GND#0]  54.36,50.8 270 bottom
U$17  [#RST#1]  32.51,10.67 0 bottom
U$18  [#VE#0]  34.54,15.37 0 bottom
U$19  [#MEAS#2]  17.78,11.3 0 top
U$20  [#VIN#1]  59.82,9.4 0 bottom
U$21  [SWD0]  22.61,24.89 90 top
U$22  SPARKX-LOGO4  [SPARKX-MEDIUM]  39.12,30.99 0 bottom
U$23  [#I�C#0]  57.4,15.24 90 top
U$24  [MICROMOD_LOGO_.35]  48.26,39.62 0 top
U$25  [#D0#1]  41.66,44.83 90 top
U$26  [MICROMOD_LOGO_.35]  110.24,39.62 0 top
U$27  [MICROMOD_LOGO_.35]  101.09,28.45 0 bottom
U$28  [##CS##3]  87.12,47.37 90 top
U$29  [#D1#0]  39.12,44.96 90 top
U$30  [##CS##3]  87.12,50.67 270 bottom
U$31  [#D1#0]  39.12,48.01 270 bottom
U$32  [#PWM0#3]  46.74,42.29 90 top
U$33  [#BYP#1]  14.48,27.18 0 top
U$34  [MICROMOD_LOGO_.35]  39.12,28.45 0 bottom
U$35  [##CS##3]  25.15,47.37 90 top
U$36  [3V37]  54.74,8 0 top
U$37  [#CIPO#2]  89.66,50.8 270 bottom
U$38  [22223]  49.4,16.89 0 top
U$39  [#CIPO#2]  89.66,45.97 90 top
U$40  [BOOT5]  41.78,8.25 0 top
U$41  [#PWM0#3]  46.74,48.26 270 bottom
U$42  [#PWM1#2]  44.2,42.54 90 top
U$43  [#SCL#3]  61.98,46.61 90 top
U$44  [#SCL#3]  61.98,50.67 270 bottom
U$45  [RESET6]  31.37,8.25 0 top
U$46  [VIN8]  58.8,8 0 top
U$47  [#COPI#1]  92.2,45.85 90 top
U$48  [#COPI#1]  92.2,50.8 270 bottom
U$49  [#PWM1#2]  44.2,48.13 270 bottom
U$50  [#SDA#2]  59.44,46.35 90 top
U$51  [#SDA#2]  59.44,50.8 270 bottom
U$52  [#GND#4]  84.58,46.35 90 top
U$53  [#GND#4]  84.58,50.8 270 bottom
U$54  [#RX1#6]  124.33,42.42 0 top
U$55  [#RX1#6]  128.4,42.42 0 bottom
U$56  [#SCK#0]  94.74,46.48 90 top
U$57  [#SCK#0]  94.74,50.67 270 bottom
U$58  [#TX1#5]  124.33,39.88 0 top
U$59  [#TX1#5]  128.52,39.88 0 bottom
U$60  [#GND#4]  124.08,44.96 0 top
U$61  [#GND#4]  128.52,44.96 0 bottom
U$62  [#A0#5]  113.79,44.7 90 top
U$63  [#A0#5]  113.79,48.13 270 bottom
U$64  [#A1#4]  111.25,44.96 90 top
U$65  [#A1#4]  111.25,48.13 270 bottom
U$66  [#D0#1]  103.63,48.13 270 bottom
U$67  [#D0#1]  103.63,44.83 90 top
U$68  [##CS##3]  25.15,50.67 270 bottom
U$69  [#CIPO#2]  27.69,50.8 270 bottom
U$70  [#CIPO#2]  27.69,45.97 90 top
U$71  [#COPI#1]  30.23,45.85 90 top
U$72  [#COPI#1]  30.23,50.8 270 bottom
U$73  [#GND#4]  22.61,46.35 90 top
U$74  [#GND#4]  22.61,50.8 270 bottom
U$75  [#RX1#6]  62.36,42.42 0 top
U$76  [#RX1#6]  66.42,42.42 0 bottom
U$77  [#SCK#0]  32.77,46.48 90 top
U$78  [#SCK#0]  32.77,50.67 270 bottom
U$79  [#TX1#5]  62.36,39.88 0 top
U$80  [#TX1#5]  66.55,39.88 0 bottom
U$81  [#GND#4]  62.1,44.96 0 top
U$82  [#GND#4]  66.55,44.96 0 bottom
U$83  [#D1#0]  101.09,44.96 90 top
U$84  [#D1#0]  101.09,48.01 270 bottom
U$85  [#PWM0#3]  108.71,42.29 90 top
U$86  [#PWM0#3]  108.71,48.26 270 bottom
U$87  [#PWM1#2]  106.17,42.54 90 top
U$88  [#PWM1#2]  106.17,48.13 270 bottom
U$89  [#GND#0]  95.89,51.31 0 top
U$90  [#GND#0]  100.33,51.31 0 bottom
U$91  [#3V3#1]  118.87,46.48 90 top
U$92  [#3V3#1]  118.87,50.93 270 bottom
U$93  [#GND#0]  116.33,46.35 90 top
U$94  [#GND#0]  116.33,50.8 270 bottom
U$95  [#SCL#3]  123.95,46.61 90 top
U$96  [#SCL#3]  123.95,50.67 270 bottom
U$97  [#SDA#2]  121.41,46.35 90 top
U$98  [#SDA#2]  121.41,50.8 270 bottom
U$99  [3V37]  116.71,8 0 top
U$100  [22223]  111.38,16.89 0 top
U$101  [BOOT5]  103.76,8.25 0 top
U$102  [RESET6]  93.34,8.25 0 top
U$103  [VIN8]  120.78,8 0 top
U$104  [#MEAS#2]  79.76,11.3 0 top
U$105  [SWD0]  84.58,24.89 90 top
U$106  [#BYP#1]  76.45,27.18 0 top
U$107  [#RST#1]  94.49,10.67 0 bottom
U$108  [#VE#0]  96.52,15.37 0 bottom
U$109  [#I�C#0]  119.38,15.24 90 top
U$110  [#3V3#0]  114.17,9.4 0 bottom
U$111  [#VIN#1]  121.79,9.4 0 bottom
U$112  [MICROSD0]  81.92,31.24 0 top
U$113  [DISPLAY0]  119.76,39.62 0 top
U$114  [DISPLAY0]  100.97,26.16 0 bottom
U$115  SPARKX-LOGO4  [SPARKX-MEDIUM]  116.33,42.42 0 top
U$116  SPARKX-LOGO4  [SPARKX-MEDIUM]  101.09,30.99 0 bottom
U$117  [MICROMOD_LOGO_.35]  48.26,85.85 0 top
U$118  [MICROMOD_LOGO_.35]  39.12,74.68 0 bottom
U$119  [##CS##3]  25.15,93.6 90 top
U$120  [##CS##3]  25.15,96.9 270 bottom
U$121  [#CIPO#2]  27.69,97.03 270 bottom
U$122  [#CIPO#2]  27.69,92.2 90 top
U$123  [#COPI#1]  30.23,92.08 90 top
U$124  [#COPI#1]  30.23,97.03 270 bottom
U$125  [#GND#4]  22.61,92.58 90 top
U$126  [#GND#4]  22.61,97.03 270 bottom
U$127  [#RX1#6]  62.36,88.65 0 top
U$128  [#RX1#6]  66.42,88.65 0 bottom
U$129  [#SCK#0]  32.77,92.71 90 top
U$130  [#SCK#0]  32.77,96.9 270 bottom
U$131  [#TX1#5]  62.36,86.11 0 top
U$132  [#TX1#5]  66.55,86.11 0 bottom
U$133  [#GND#4]  62.1,91.19 0 top
U$134  [#GND#4]  66.55,91.19 0 bottom
U$135  [#A0#5]  51.82,90.93 90 top
U$136  [#A0#5]  51.82,94.36 270 bottom
U$137  [#A1#4]  49.28,91.19 90 top
U$138  [#A1#4]  49.28,94.36 270 bottom
U$139  [#D0#1]  41.66,94.36 270 bottom
U$140  [#D0#1]  41.66,91.06 90 top
U$141  [#D1#0]  39.12,91.19 90 top
U$142  [#D1#0]  39.12,94.23 270 bottom
U$143  [#PWM0#3]  46.74,88.52 90 top
U$144  [#PWM0#3]  46.74,94.49 270 bottom
U$145  [#PWM1#2]  44.2,88.77 90 top
U$146  [#PWM1#2]  44.2,94.36 270 bottom
U$147  [#GND#0]  33.91,97.54 0 top
U$148  [#GND#0]  38.35,97.54 0 bottom
U$149  [#3V3#1]  56.9,92.71 90 top
U$150  [#3V3#1]  56.9,97.16 270 bottom
U$151  [#GND#0]  54.36,92.58 90 top
U$152  [#GND#0]  54.36,97.03 270 bottom
U$153  [#SCL#3]  61.98,92.84 90 top
U$154  [#SCL#3]  61.98,96.9 270 bottom
U$155  [#SDA#2]  59.44,92.58 90 top
U$156  [#SDA#2]  59.44,97.03 270 bottom
U$157  [3V37]  54.74,54.23 0 top
U$158  [22223]  49.4,63.12 0 top
U$159  [BOOT5]  41.78,54.48 0 top
U$160  [RESET6]  31.37,54.48 0 top
U$161  [VIN8]  58.8,54.23 0 top
U$162  [#MEAS#2]  17.78,57.53 0 top
U$163  [SWD0]  22.61,71.12 90 top
U$164  [#BYP#1]  14.48,73.41 0 top
U$165  [#RST#1]  32.51,56.9 0 bottom
U$166  [#VE#0]  34.54,61.59 0 bottom
U$167  [#I�C#0]  57.4,61.47 90 top
U$168  [#3V3#0]  52.2,55.63 0 bottom
U$169  [#VIN#1]  59.82,55.63 0 bottom
U$170  [MICROSD0]  19.94,77.47 0 top
U$171  [DISPLAY0]  57.78,85.85 0 top
U$172  [DISPLAY0]  38.99,72.39 0 bottom
U$173  SPARKX-LOGO4  [SPARKX-MEDIUM]  54.36,88.65 0 top
U$174  SPARKX-LOGO4  [SPARKX-MEDIUM]  39.12,77.22 0 bottom
U$175  [MICROMOD_LOGO_.35]  110.24,85.85 0 top
U$176  [MICROMOD_LOGO_.35]  101.09,74.68 0 bottom
U$177  [##CS##3]  87.12,93.6 90 top
U$178  [##CS##3]  87.12,96.9 270 bottom
U$179  [#CIPO#2]  89.66,97.03 270 bottom
U$180  [#CIPO#2]  89.66,92.2 90 top
U$181  [#COPI#1]  92.2,92.08 90 top
U$182  [#COPI#1]  92.2,97.03 270 bottom
U$183  [#GND#4]  84.58,92.58 90 top
U$184  [#GND#4]  84.58,97.03 270 bottom
U$185  [#RX1#6]  124.33,88.65 0 top
U$186  [#RX1#6]  128.4,88.65 0 bottom
U$187  [#SCK#0]  94.74,92.71 90 top
U$188  [#SCK#0]  94.74,96.9 270 bottom
U$189  [#TX1#5]  124.33,86.11 0 top
U$190  [#TX1#5]  128.52,86.11 0 bottom
U$191  [#GND#4]  124.08,91.19 0 top
U$192  [#GND#4]  128.52,91.19 0 bottom
U$193  [#A0#5]  113.79,90.93 90 top
U$194  [#A0#5]  113.79,94.36 270 bottom
U$195  [#A1#4]  111.25,91.19 90 top
U$196  [#A1#4]  111.25,94.36 270 bottom
U$197  [#D0#1]  103.63,94.36 270 bottom
U$198  [#D0#1]  103.63,91.06 90 top
U$199  [#D1#0]  101.09,91.19 90 top
U$200  [#D1#0]  101.09,94.23 270 bottom
U$201  [#PWM0#3]  108.71,88.52 90 top
U$202  [#PWM0#3]  108.71,94.49 270 bottom
U$203  [#PWM1#2]  106.17,88.77 90 top
U$204  [#PWM1#2]  106.17,94.36 270 bottom
U$205  [#GND#0]  95.89,97.54 0 top
U$206  [#GND#0]  100.33,97.54 0 bottom
U$207  [#3V3#1]  118.87,92.71 90 top
U$208  [#3V3#1]  118.87,97.16 270 bottom
U$209  [#GND#0]  116.33,92.58 90 top
U$210  [#GND#0]  116.33,97.03 270 bottom
U$211  [#SCL#3]  123.95,92.84 90 top
U$212  [#SCL#3]  123.95,96.9 270 bottom
U$213  [#SDA#2]  121.41,92.58 90 top
U$214  [#SDA#2]  121.41,97.03 270 bottom
U$215  [3V37]  116.71,54.23 0 top
U$216  [22223]  111.38,63.12 0 top
U$217  [BOOT5]  103.76,54.48 0 top
U$218  [RESET6]  93.34,54.48 0 top
U$219  [VIN8]  120.78,54.23 0 top
U$220  [#MEAS#2]  79.76,57.53 0 top
U$221  [SWD0]  84.58,71.12 90 top
U$222  [#BYP#1]  76.45,73.41 0 top
U$223  [#RST#1]  94.49,56.9 0 bottom
U$224  [#VE#0]  96.52,61.59 0 bottom
U$225  [#I�C#0]  119.38,61.47 90 top
U$226  [#3V3#0]  114.17,55.63 0 bottom
U$227  [#VIN#1]  121.79,55.63 0 bottom
U$228  [MICROSD0]  81.92,77.47 0 top
U$229  [DISPLAY0]  119.76,85.85 0 top
U$230  [DISPLAY0]  100.97,72.39 0 bottom
U$231  SPARKX-LOGO4  [SPARKX-MEDIUM]  116.33,88.65 0 top
U$232  SPARKX-LOGO4  [SPARKX-MEDIUM]  101.09,77.22 0 bottom
U$233  [MICROMOD_LOGO_.35]  48.26,132.08 0 top
U$234  [MICROMOD_LOGO_.35]  39.12,120.9 0 bottom
U$235  [##CS##3]  25.15,139.83 90 top
U$236  [##CS##3]  25.15,143.13 270 bottom
U$237  [#CIPO#2]  27.69,143.26 270 bottom
U$238  [#CIPO#2]  27.69,138.43 90 top
U$239  [#COPI#1]  30.23,138.3 90 top
U$240  [#COPI#1]  30.23,143.26 270 bottom
U$241  [#GND#4]  22.61,138.81 90 top
U$242  [#GND#4]  22.61,143.26 270 bottom
U$243  [#RX1#6]  62.36,134.87 0 top
U$244  [#RX1#6]  66.42,134.87 0 bottom
U$245  [#SCK#0]  32.77,138.94 90 top
U$246  [#SCK#0]  32.77,143.13 270 bottom
U$247  [#TX1#5]  62.36,132.33 0 top
U$248  [#TX1#5]  66.55,132.33 0 bottom
U$249  [#GND#4]  62.1,137.41 0 top
U$250  [#GND#4]  66.55,137.41 0 bottom
U$251  [#A0#5]  51.82,137.16 90 top
U$252  [#A0#5]  51.82,140.59 270 bottom
U$253  [#A1#4]  49.28,137.41 90 top
U$254  [#A1#4]  49.28,140.59 270 bottom
U$255  [#D0#1]  41.66,140.59 270 bottom
U$256  [#D0#1]  41.66,137.29 90 top
U$257  [#D1#0]  39.12,137.41 90 top
U$258  [#D1#0]  39.12,140.46 270 bottom
U$259  [#PWM0#3]  46.74,134.75 90 top
U$260  [#PWM0#3]  46.74,140.72 270 bottom
U$261  [#PWM1#2]  44.2,135 90 top
U$262  [#PWM1#2]  44.2,140.59 270 bottom
U$263  [#GND#0]  33.91,143.76 0 top
U$264  [#GND#0]  38.35,143.76 0 bottom
U$265  [#3V3#1]  56.9,138.94 90 top
U$266  [#3V3#1]  56.9,143.38 270 bottom
U$267  [#GND#0]  54.36,138.81 90 top
U$268  [#GND#0]  54.36,143.26 270 bottom
U$269  [#SCL#3]  61.98,139.06 90 top
U$270  [#SCL#3]  61.98,143.13 270 bottom
U$271  [#SDA#2]  59.44,138.81 90 top
U$272  [#SDA#2]  59.44,143.26 270 bottom
U$273  [3V37]  54.74,100.46 0 top
U$274  [22223]  49.4,109.35 0 top
U$275  [BOOT5]  41.78,100.71 0 top
U$276  [RESET6]  31.37,100.71 0 top
U$277  [VIN8]  58.8,100.46 0 top
U$278  [#MEAS#2]  17.78,103.76 0 top
U$279  [SWD0]  22.61,117.35 90 top
U$280  [#BYP#1]  14.48,119.63 0 top
U$281  [#RST#1]  32.51,103.12 0 bottom
U$282  [#VE#0]  34.54,107.82 0 bottom
U$283  [#I�C#0]  57.4,107.7 90 top
U$284  [#3V3#0]  52.2,101.85 0 bottom
U$285  [#VIN#1]  59.82,101.85 0 bottom
U$286  [MICROSD0]  19.94,123.7 0 top
U$287  [DISPLAY0]  57.78,132.08 0 top
U$288  [DISPLAY0]  38.99,118.62 0 bottom
U$289  SPARKX-LOGO4  [SPARKX-MEDIUM]  54.36,134.87 0 top
U$290  SPARKX-LOGO4  [SPARKX-MEDIUM]  39.12,123.44 0 bottom
U$291  [MICROMOD_LOGO_.35]  110.24,132.08 0 top
U$292  [MICROMOD_LOGO_.35]  101.09,120.9 0 bottom
U$293  [##CS##3]  87.12,139.83 90 top
U$294  [##CS##3]  87.12,143.13 270 bottom
U$295  [#CIPO#2]  89.66,143.26 270 bottom
U$296  [#CIPO#2]  89.66,138.43 90 top
U$297  [#COPI#1]  92.2,138.3 90 top
U$298  [#COPI#1]  92.2,143.26 270 bottom
U$299  [#GND#4]  84.58,138.81 90 top
U$300  [#GND#4]  84.58,143.26 270 bottom
U$301  [#RX1#6]  124.33,134.87 0 top
U$302  [#RX1#6]  128.4,134.87 0 bottom
U$303  [#SCK#0]  94.74,138.94 90 top
U$304  [#SCK#0]  94.74,143.13 270 bottom
U$305  [#TX1#5]  124.33,132.33 0 top
U$306  [#TX1#5]  128.52,132.33 0 bottom
U$307  [#GND#4]  124.08,137.41 0 top
U$308  [#GND#4]  128.52,137.41 0 bottom
U$309  [#A0#5]  113.79,137.16 90 top
U$310  [#A0#5]  113.79,140.59 270 bottom
U$311  [#A1#4]  111.25,137.41 90 top
U$312  [#A1#4]  111.25,140.59 270 bottom
U$313  [#D0#1]  103.63,140.59 270 bottom
U$314  [#D0#1]  103.63,137.29 90 top
U$315  [#D1#0]  101.09,137.41 90 top
U$316  [#D1#0]  101.09,140.46 270 bottom
U$317  [#PWM0#3]  108.71,134.75 90 top
U$318  [#PWM0#3]  108.71,140.72 270 bottom
U$319  [#PWM1#2]  106.17,135 90 top
U$320  [#PWM1#2]  106.17,140.59 270 bottom
U$321  [#GND#0]  95.89,143.76 0 top
U$322  [#GND#0]  100.33,143.76 0 bottom
U$323  [#3V3#1]  118.87,138.94 90 top
U$324  [#3V3#1]  118.87,143.38 270 bottom
U$325  [#GND#0]  116.33,138.81 90 top
U$326  [#GND#0]  116.33,143.26 270 bottom
U$327  [#SCL#3]  123.95,139.06 90 top
U$328  [#SCL#3]  123.95,143.13 270 bottom
U$329  [#SDA#2]  121.41,138.81 90 top
U$330  [#SDA#2]  121.41,143.26 270 bottom
U$331  [3V37]  116.71,100.46 0 top
U$332  [22223]  111.38,109.35 0 top
U$333  [BOOT5]  103.76,100.71 0 top
U$334  [RESET6]  93.34,100.71 0 top
U$335  [VIN8]  120.78,100.46 0 top
U$336  [#MEAS#2]  79.76,103.76 0 top
U$337  [SWD0]  84.58,117.35 90 top
U$338  [#BYP#1]  76.45,119.63 0 top
U$339  [#RST#1]  94.49,103.12 0 bottom
U$340  [#VE#0]  96.52,107.82 0 bottom
U$341  [#I�C#0]  119.38,107.7 90 top
U$342  [#3V3#0]  114.17,101.85 0 bottom
U$343  [#VIN#1]  121.79,101.85 0 bottom
U$344  [MICROSD0]  81.92,123.7 0 top
U$345  [DISPLAY0]  119.76,132.08 0 top
U$346  [DISPLAY0]  100.97,118.62 0 bottom
U$347  SPARKX-LOGO4  [SPARKX-MEDIUM]  116.33,134.87 0 top
U$348  SPARKX-LOGO4  [SPARKX-MEDIUM]  101.09,123.44 0 bottom
VE  [SMT-JUMPER_2_NO_SILK]  35.31,15.37 0 bottom
VE1  [SMT-JUMPER_2_NO_SILK]  97.28,15.37 0 bottom
VE2  [SMT-JUMPER_2_NO_SILK]  35.31,61.59 0 bottom
VE3  [SMT-JUMPER_2_NO_SILK]  97.28,61.59 0 bottom
VE4  [SMT-JUMPER_2_NO_SILK]  35.31,107.82 0 bottom
VE5  [SMT-JUMPER_2_NO_SILK]  97.28,107.82 0 bottom
VIN_LED  [SMT-JUMPER_2_NC_TRACE_SILK]  60.71,9.4 0 bottom
VIN_LED1  [SMT-JUMPER_2_NC_TRACE_SILK]  122.68,9.4 0 bottom
VIN_LED2  [SMT-JUMPER_2_NC_TRACE_SILK]  60.71,55.63 0 bottom
VIN_LED3  [SMT-JUMPER_2_NC_TRACE_SILK]  122.68,55.63 0 bottom
VIN_LED4  [SMT-JUMPER_2_NC_TRACE_SILK]  60.71,101.85 0 bottom
VIN_LED5  [SMT-JUMPER_2_NC_TRACE_SILK]  122.68,101.85 0 bottom

## Library data of the parts
3V3_LED 3V3_LED1-3V3_LED5 BYP BYP1-BYP5 JP1-JP6 MEAS MEAS1-MEAS5 VE VE1-VE5 VIN_LED VIN_LED1-VIN_LED5 = SparkFun-Jumpers
C1 C4 C16 C17 C20 C31 C32 C35 C46-C48 C51 C62 C63 C66 C77 C78 C81 = SparkFun-Capacitors; PROD_ID: CAP-00810
C2 C18 C33 C49 C64 C79 = SparkFun-Capacitors; PROD_ID: CAP-00811
C3 C19 C34 C50 C65 C80 = SparkFun-Capacitors; PROD_ID: CAP-00868
C5 C13 C15 C21 C30 C36 C45 C52 C61 C67 C76 C82 = SparkFun-Capacitors; PROD_ID: CAP-07822
C6-C12 C14 C22-C29 C37-C44 C53-C60 C68-C75 C83-C90 = SparkFun-Capacitors; PROD_ID: CAP-08604
D1 D6 D11 D16 D21 D26 = SparkFun-DiscreteSemi; PROD_ID: DIO-11284
D2 D7 D12 D17 D22 D27 = SparkFun-LED; PROD_ID: DIO-00819
D3 D5 D9 D10 D14 D15 D19 D20 D24 D25 D29 D30 = SparkFun-DiscreteSemi; PROD_ID: DIO-14072
D4 D8 D13 D18 D23 D28 = SparkFun-LED; PROD_ID: DIO-09003
E$1-E$4 FD1-FD24 LOGO1-LOGO12 = SparkFun-Aesthetics
E$5 E$6 = SparkFun-Retired
F1-F6 = SparkFun-Fuses; PROD_ID: RES-14313
H1-H4 H6-H9 H11-H14 H16-H19 H21-H24 H26-H29 = SparkFun-Hardware
H5 H10 H15 H20 H25 H30 = SparkFun-Hardware; PROD_ID: HW-14899
J1 J12 J25 J37 J49 J61 = SparkFun-Connectors; PROD_ID: CONN-14122
J2 J5 J6 J8-J10 J14-J18 J20 J21 J23 J27-J30 J32 J33 J35 J39-J42 J44 J45 J47 J51-J54 J56 J57 J59 J63-J66 J68 J69 J71 = SparkFun-Connectors
J3 J13 J26 J38 J50 J62 = SparkFun-Connectors; PROD_ID: CONN-13694
J4 J22 J34 J46 J58 J70 = SparkFun-MicroMod; PROD_ID: CONN-14877
J7 J24 J36 J48 J60 J72 = New_Parts
J11 J19 J31 J43 J55 J67 = SparkFun-Connectors; PROD_ID: CONN-07820
R1 R4 R12 R13 R21 R22 R30 R31 R39 R40 R48 R49 = SparkFun-Resistors; PROD_ID: RES-08272
R2 R3 R7 R8 R19 R20 R28 R29 R37 R38 R46 R47 = SparkFun-Resistors; PROD_ID: RES-12083
R5 R16 R25 R34 R43 R52 = SparkFun-Resistors; PROD_ID: RES-07828
R6 R18 R27 R36 R45 R54 = SparkFun-Resistors; PROD_ID: RES-07857
R9 R14 R23 R32 R41 R50 = SparkFun-Resistors; PROD_ID: RES-00824
R10 R15 R24 R33 R42 R51 = SparkFun-Resistors; PROD_ID: RES-09383
R11 R17 R26 R35 R44 R53 = SparkFun-Resistors; PROD_ID: RES-07856
S1-S12 = SparkFun-Switches; PROD_ID: SWCH-14139
U1-U6 = SparkFun-IC-Power; PROD_ID: VREG-14094
U$1 U$22 U$115 U$116 U$173 U$174 U$231 U$232 U$289 U$290 U$347 U$348 = SparkX
U$2-U$21 U$23 U$25 U$28-U$33 U$35-U$114 U$119-U$172 U$177-U$230 U$235-U$288 U$293-U$346 = output
U$24 U$26 U$27 U$34 U$117 U$118 U$175 U$176 U$233 U$234 U$291 U$292 = SparkFun-MicroMod

## Nets
3.3V: 3V3_LED.2 C3.1 C4.1 C5.1 C46.1 J2.1 J3.2 J4.2 J4.74 J11.VCC J14.2 JP1.2 MEAS.2 MEAS.4
3.3V1: 3V3_LED1.2 C16.1 C19.1 C20.1 C21.1 J13.2 J15.1 J19.VCC J21.2 J22.2 J22.74 JP2.2 MEAS1.2 MEAS1.4
3.3V2: 3V3_LED2.2 C31.1 C34.1 C35.1 C36.1 J26.2 J27.1 J31.VCC J33.2 J34.2 J34.74 JP3.2 MEAS2.2 MEAS2.4
3.3V3: 3V3_LED3.2 C47.1 C50.1 C51.1 C52.1 J38.2 J39.1 J43.VCC J45.2 J46.2 J46.74 JP4.2 MEAS3.2 MEAS3.4
3.3V4: 3V3_LED4.2 C62.1 C65.1 C66.1 C67.1 J50.2 J51.1 J55.VCC J57.2 J58.2 J58.74 JP5.2 MEAS4.2 MEAS4.4
3.3V5: 3V3_LED5.2 C77.1 C80.1 C81.1 C82.1 J62.2 J63.1 J67.VCC J69.2 J70.2 J70.74 JP6.2 MEAS5.2 MEAS5.4
3.3V_EN: J4.4 VE.1
3.3V_EN1: J22.4 VE1.1
3.3V_EN2: J34.4 VE2.1
3.3V_EN3: J46.4 VE3.1
3.3V_EN4: J58.4 VE4.1
3.3V_EN5: J70.4 VE5.1
!BOOT!: J4.11 S2.3 S2.4
!BOOT!1: J22.11 S4.3 S4.4
!BOOT!2: J34.11 S6.3 S6.4
!BOOT!3: J46.11 S8.3 S8.4
!BOOT!4: J58.11 S10.3 S10.4
!BOOT!5: J70.11 S12.3 S12.4
!RESET!: J2.10 J4.6 J9.1 S1.3 S1.4
!RESET!1: J15.10 J22.6 J23.1 S3.3 S3.4
!RESET!2: J27.10 J34.6 J35.1 S5.3 S5.4
!RESET!3: J39.10 J46.6 J47.1 S7.3 S7.4
!RESET!4: J51.10 J58.6 J59.1 S9.3 S9.4
!RESET!5: J63.10 J70.6 J71.1 S11.3 S11.4
A0: J4.34 J8.1
A1: J4.38 J8.2
A2: J17.1 J22.34
A3: J17.2 J22.38
A4: J29.1 J34.34
A5: J29.2 J34.38
A6: J41.1 J46.34
A7: J41.2 J46.38
A8: J53.1 J58.34
A9: J53.2 J58.38
A10: J65.1 J70.34
A11: J65.2 J70.38
CLK+: C6.1 J4.42
CLK+1: C28.1 J22.42
CLK+2: C43.1 J34.42
CLK+3: C59.1 J46.42
CLK+4: C74.1 J58.42
CLK+5: C89.1 J70.42
CLK-: C14.1 J4.40
CLK-1: C29.1 J22.40
CLK-2: C44.1 J34.40
CLK-3: C60.1 J46.40
CLK-4: C75.1 J58.40
CLK-5: C90.1 J70.40
D0+: C11.1 J4.46
D0+1: C26.1 J22.46
D0+2: C41.1 J34.46
D0+3: C57.1 J46.46
D0+4: C72.1 J58.46
D0+5: C87.1 J70.46
D0-: C12.1 J4.44
D0-1: C27.1 J22.44
D0-2: C42.1 J34.44
D0-3: C58.1 J46.44
D0-4: C73.1 J58.44
D0-5: C88.1 J70.44
D0/HEADER_!CS!: J4.10 J5.4 J8.5
D0/HEADER_!CS!1: J16.4 J17.5 J22.10
D0/HEADER_!CS!2: J28.4 J29.5 J34.10
D0/HEADER_!CS!3: J40.4 J41.5 J46.10
D0/HEADER_!CS!4: J52.4 J53.5 J58.10
D0/HEADER_!CS!5: J64.4 J65.5 J70.10
D1: J4.18 J8.6
D1+: C9.1 J4.73
D1+1: C24.1 J22.73
D1+2: C39.1 J34.73
D1+3: C55.1 J46.73
D1+4: C70.1 J58.73
D1+5: C85.1 J70.73
D1-: C10.1 J4.48
D1-1: C25.1 J22.48
D1-2: C40.1 J34.48
D1-3: C56.1 J46.48
D1-4: C71.1 J58.48
D1-5: C86.1 J70.48
D2: J17.6 J22.18
D2+: C7.1 J4.69
D2+1: C22.1 J22.69
D2+2: C37.1 J34.69
D2+3: C53.1 J46.69
D2+4: C68.1 J58.69
D2+5: C83.1 J70.69
D2-: C8.1 J4.71
D2-1: C23.1 J22.71
D2-2: C38.1 J34.71
D2-3: C54.1 J46.71
D2-4: C69.1 J58.71
D2-5: C84.1 J70.71
D3: J29.6 J34.18
D4: J41.6 J46.18
D5: J53.6 J58.18
D6: J65.6 J70.18
GND: C1.2 C2.- C3.2 C4.2 C5.2 C13.2 C46.2 D1.A D2.C D4.C H5.1 J1.GND J1.GND2 J2.3 J2.5 J2.9 J3.1 J4.1 J4.7 J4.33 J4.36 J4.39 J4.45 J4.75 J5.5 J6.3 J7.2 J7.5 J7.8 J7.11 J7.17 J7.MH1 J7.MH2 J7.MH3 J7.MH4 J10.1 J10.2 J10.3 J10.4 J10.5 J10.6 J11.CD1 J11.GND J11.GND1 J11.GND3 J14.1 R2.1 R3.1 R9.1 S1.1 S1.2 S2.1 S2.2 U5.4 U5.EP
GND1: C15.2 C16.2 C17.2 C18.- C19.2 C20.2 C21.2 D6.A D7.C D8.C H10.1 J12.GND J12.GND2 J13.1 J15.3 J15.5 J15.9 J16.5 J18.1 J18.2 J18.3 J18.4 J18.5 J18.6 J19.CD1 J19.GND J19.GND1 J19.GND3 J20.3 J21.1 J22.1 J22.7 J22.33 J22.36 J22.39 J22.45 J22.75 J24.2 J24.5 J24.8 J24.11 J24.17 J24.MH1 J24.MH2 J24.MH3 J24.MH4 R7.1 R8.1 R14.1 S3.1 S3.2 S4.1 S4.2 U1.4 U1.EP
GND2: C30.2 C31.2 C32.2 C33.- C34.2 C35.2 C36.2 D11.A D12.C D13.C H15.1 J25.GND J25.GND2 J26.1 J27.3 J27.5 J27.9 J28.5 J30.1 J30.2 J30.3 J30.4 J30.5 J30.6 J31.CD1 J31.GND J31.GND1 J31.GND3 J32.3 J33.1 J34.1 J34.7 J34.33 J34.36 J34.39 J34.45 J34.75 J36.2 J36.5 J36.8 J36.11 J36.17 J36.MH1 J36.MH2 J36.MH3 J36.MH4 R19.1 R20.1 R23.1 S5.1 S5.2 S6.1 S6.2 U2.4 U2.EP
GND3: C45.2 C47.2 C48.2 C49.- C50.2 C51.2 C52.2 D16.A D17.C D18.C H20.1 J37.GND J37.GND2 J38.1 J39.3 J39.5 J39.9 J40.5 J42.1 J42.2 J42.3 J42.4 J42.5 J42.6 J43.CD1 J43.GND J43.GND1 J43.GND3 J44.3 J45.1 J46.1 J46.7 J46.33 J46.36 J46.39 J46.45 J46.75 J48.2 J48.5 J48.8 J48.11 J48.17 J48.MH1 J48.MH2 J48.MH3 J48.MH4 R28.1 R29.1 R32.1 S7.1 S7.2 S8.1 S8.2 U3.4 U3.EP
GND4: C61.2 C62.2 C63.2 C64.- C65.2 C66.2 C67.2 D21.A D22.C D23.C H25.1 J49.GND J49.GND2 J50.1 J51.3 J51.5 J51.9 J52.5 J54.1 J54.2 J54.3 J54.4 J54.5 J54.6 J55.CD1 J55.GND J55.GND1 J55.GND3 J56.3 J57.1 J58.1 J58.7 J58.33 J58.36 J58.39 J58.45 J58.75 J60.2 J60.5 J60.8 J60.11 J60.17 J60.MH1 J60.MH2 J60.MH3 J60.MH4 R37.1 R38.1 R41.1 S9.1 S9.2 S10.1 S10.2 U4.4 U4.EP
GND5: C76.2 C77.2 C78.2 C79.- C80.2 C81.2 C82.2 D26.A D27.C D28.C H30.1 J61.GND J61.GND2 J62.1 J63.3 J63.5 J63.9 J64.5 J66.1 J66.2 J66.3 J66.4 J66.5 J66.6 J67.CD1 J67.GND J67.GND1 J67.GND3 J68.3 J69.1 J70.1 J70.7 J70.33 J70.36 J70.39 J70.45 J70.75 J72.2 J72.5 J72.8 J72.11 J72.17 J72.MH1 J72.MH2 J72.MH3 J72.MH4 R46.1 R47.1 R50.1 S11.1 S11.2 S12.1 S12.2 U6.4 U6.EP
HDMI_5V: D5.A J7.18
HDMI_5V1: D10.A J24.18
HDMI_5V2: D15.A J36.18
HDMI_5V3: D20.A J48.18
HDMI_5V4: D25.A J60.18
HDMI_5V5: D30.A J72.18
I2C_SCL: J3.4 J4.14 J7.15 J14.4 R4.1
I2C_SCL1: J13.4 J21.4 J22.14 J24.15 R13.1
I2C_SCL2: J26.4 J33.4 J34.14 J36.15 R22.1
I2C_SCL3: J38.4 J45.4 J46.14 J48.15 R31.1
I2C_SCL4: J50.4 J57.4 J58.14 J60.15 R40.1
I2C_SCL5: J62.4 J69.4 J70.14 J72.15 R49.1
I2C_SDA: J3.3 J4.12 J7.16 J14.3 R1.1
I2C_SDA1: J13.3 J21.3 J22.12 J24.16 R12.1
I2C_SDA2: J26.3 J33.3 J34.12 J36.16 R21.1
I2C_SDA3: J38.3 J45.3 J46.12 J48.16 R30.1
I2C_SDA4: J50.3 J57.3 J58.12 J60.16 R39.1
I2C_SDA5: J62.3 J69.3 J70.12 J72.16 R48.1
N$1: R6.2 VIN_LED.1
N$2: JP1.3 R4.2
N$3: JP1.1 R1.2
N$4: C7.2 J7.1
N$5: C8.2 J7.3
N$6: 3V3_LED.1 R11.2
N$7: D2.A R11.1
N$8: D4.A R6.1
N$9: C9.2 J7.4
N$10: J1.A5 R2.2
N$11: J1.B5 R3.2
N$12: D1.C R5.1 U5.5 VE.2
N$13: C10.2 J7.6
N$14: C11.2 J7.7
N$15: C12.2 J7.9
N$16: C6.2 J7.10
N$17: C14.2 J7.12
N$18: BYP.2 D3.A F2.2
N$19: J12.A5 R7.2
N$20: J12.B5 R8.2
N$21: JP2.3 R13.2
N$22: JP2.1 R12.2
N$23: 3V3_LED1.1 R17.2
N$24: D7.A R17.1
N$25: R18.2 VIN_LED1.1
N$26: D8.A R18.1
N$27: D6.C R16.1 U1.5 VE1.2
N$28: C22.2 J24.1
N$29: C23.2 J24.3
N$30: C24.2 J24.4
N$31: C25.2 J24.6
N$32: C28.2 J24.10
N$33: C29.2 J24.12
N$34: C26.2 J24.7
N$35: C27.2 J24.9
N$36: BYP1.2 D9.A F1.2
N$37: J25.A5 R19.2
N$38: J25.B5 R20.2
N$39: JP3.3 R22.2
N$40: JP3.1 R21.2
N$41: 3V3_LED2.1 R26.2
N$42: D12.A R26.1
N$43: R27.2 VIN_LED2.1
N$44: D13.A R27.1
N$45: D11.C R25.1 U2.5 VE2.2
N$46: C37.2 J36.1
N$47: C38.2 J36.3
N$48: C39.2 J36.4
N$49: C40.2 J36.6
N$50: C43.2 J36.10
N$51: C44.2 J36.12
N$52: C41.2 J36.7
N$53: C42.2 J36.9
N$54: BYP2.2 D14.A F3.2
N$55: J37.A5 R28.2
N$56: J37.B5 R29.2
N$57: JP4.3 R31.2
N$58: JP4.1 R30.2
N$59: 3V3_LED3.1 R35.2
N$60: D17.A R35.1
N$61: R36.2 VIN_LED3.1
N$62: D18.A R36.1
N$63: D16.C R34.1 U3.5 VE3.2
N$64: C53.2 J48.1
N$65: C54.2 J48.3
N$66: C55.2 J48.4
N$67: C56.2 J48.6
N$68: C59.2 J48.10
N$69: C60.2 J48.12
N$70: C57.2 J48.7
N$71: C58.2 J48.9
N$72: BYP3.2 D19.A F4.2
N$73: J49.A5 R37.2
N$74: J49.B5 R38.2
N$75: JP5.3 R40.2
N$76: JP5.1 R39.2
N$77: 3V3_LED4.1 R44.2
N$78: D22.A R44.1
N$79: R45.2 VIN_LED4.1
N$80: D23.A R45.1
N$81: D21.C R43.1 U4.5 VE4.2
N$82: C68.2 J60.1
N$83: C69.2 J60.3
N$84: C70.2 J60.4
N$85: C71.2 J60.6
N$86: C74.2 J60.10
N$87: C75.2 J60.12
N$88: C72.2 J60.7
N$89: C73.2 J60.9
N$90: BYP4.2 D24.A F5.2
N$91: J61.A5 R46.2
N$92: J61.B5 R47.2
N$93: JP6.3 R49.2
N$94: JP6.1 R48.2
N$95: 3V3_LED5.1 R53.2
N$96: D27.A R53.1
N$97: R54.2 VIN_LED5.1
N$98: D28.A R54.1
N$99: D26.C R52.1 U6.5 VE5.2
N$100: C83.2 J72.1
N$101: C84.2 J72.3
N$102: C85.2 J72.4
N$103: C86.2 J72.6
N$104: C89.2 J72.10
N$105: C90.2 J72.12
N$106: C87.2 J72.7
N$107: C88.2 J72.9
N$108: BYP5.2 D29.A F6.2
PWM0: J4.32 J8.3
PWM1: J4.47 J8.4
PWM2: J17.3 J22.32
PWM3: J17.4 J22.47
PWM4: J29.3 J34.32
PWM5: J29.4 J34.47
PWM6: J41.3 J46.32
PWM7: J41.4 J46.47
PWM8: J53.3 J58.32
PWM9: J53.4 J58.47
PWM10: J65.3 J70.32
PWM11: J65.4 J70.47
RTC_3V: J4.72
RTC_3V1: J22.72
RTC_3V2: J34.72
RTC_3V3: J46.72
RTC_3V4: J58.72
RTC_3V5: J70.72
RX1: J4.19 J6.2
RX2: J20.2 J22.19
RX3: J32.2 J34.19
RX4: J44.2 J46.19
RX5: J56.2 J58.19
RX6: J68.2 J70.19
SD_CLK/SCK: J4.60 J5.1 J11.SCLK
SD_CLK/SCK1: J16.1 J19.SCLK J22.60
SD_CLK/SCK2: J28.1 J31.SCLK J34.60
SD_CLK/SCK3: J40.1 J43.SCLK J46.60
SD_CLK/SCK4: J52.1 J55.SCLK J58.60
SD_CLK/SCK5: J64.1 J67.SCLK J70.60
SD_CMD/COPI: J4.62 J5.2 J11.DI/CMD
SD_CMD/COPI1: J16.2 J19.DI/CMD J22.62
SD_CMD/COPI2: J28.2 J31.DI/CMD J34.62
SD_CMD/COPI3: J40.2 J43.DI/CMD J46.62
SD_CMD/COPI4: J52.2 J55.DI/CMD J58.62
SD_CMD/COPI5: J64.2 J67.DI/CMD J70.62
SD_DAT0/CIPO: J4.64 J5.3 J11.DO/DAT0
SD_DAT0/CIPO1: J16.3 J19.DO/DAT0 J22.64
SD_DAT0/CIPO2: J28.3 J31.DO/DAT0 J34.64
SD_DAT0/CIPO3: J40.3 J43.DO/DAT0 J46.64
SD_DAT0/CIPO4: J52.3 J55.DO/DAT0 J58.64
SD_DAT0/CIPO5: J64.3 J67.DO/DAT0 J70.64
SD_DAT1: J4.66 J11.DAT1
SD_DAT2: J4.68 J11.DAT2
SD_DAT3: J19.DAT1 J22.66
SD_DAT3/!CS!: J4.70 J11.CS/DAT3
SD_DAT3/!CS!1: J19.CS/DAT3 J22.70
SD_DAT3/!CS!2: J31.CS/DAT3 J34.70
SD_DAT3/!CS!3: J43.CS/DAT3 J46.70
SD_DAT3/!CS!4: J55.CS/DAT3 J58.70
SD_DAT3/!CS!5: J67.CS/DAT3 J70.70
SD_DAT4: J19.DAT2 J22.68
SD_DAT5: J31.DAT1 J34.66
SD_DAT6: J31.DAT2 J34.68
SD_DAT7: J43.DAT1 J46.66
SD_DAT8: J43.DAT2 J46.68
SD_DAT9: J55.DAT1 J58.66
SD_DAT10: J55.DAT2 J58.68
SD_DAT11: J67.DAT1 J70.66
SD_DAT12: J67.DAT2 J70.68
SWDCK: J2.4 J4.21
SWDCK1: J15.4 J22.21
SWDCK2: J27.4 J34.21
SWDCK3: J39.4 J46.21
SWDCK4: J51.4 J58.21
SWDCK5: J63.4 J70.21
SWDIO: J2.2 J4.23
SWDIO1: J15.2 J22.23
SWDIO2: J27.2 J34.23
SWDIO3: J39.2 J46.23
SWDIO4: J51.2 J58.23
SWDIO5: J63.2 J70.23
TX1: J4.17 J6.1
TX2: J20.1 J22.17
TX3: J32.1 J34.17
TX4: J44.1 J46.17
TX5: J56.1 J58.17
TX6: J68.1 J70.17
USB_D+: J1.A6 J1.B6 J4.3
USB_D+1: J12.A6 J12.B6 J22.3
USB_D+2: J25.A6 J25.B6 J34.3
USB_D+3: J37.A6 J37.B6 J46.3
USB_D+4: J49.A6 J49.B6 J58.3
USB_D+5: J61.A6 J61.B6 J70.3
USB_D-: J1.A7 J1.B7 J4.5
USB_D-1: J12.A7 J12.B7 J22.5
USB_D-2: J25.A7 J25.B7 J34.5
USB_D-3: J37.A7 J37.B7 J46.5
USB_D-4: J49.A7 J49.B7 J58.5
USB_D-5: J61.A7 J61.B7 J70.5
V_USB: BYP.1 F2.1 J1.VBUS1 J1.VBUS2
V_USB1: BYP1.1 F1.1 J12.VBUS1 J12.VBUS2
V_USB2: BYP2.1 F3.1 J25.VBUS1 J25.VBUS2
V_USB3: BYP3.1 F4.1 J37.VBUS1 J37.VBUS2
V_USB4: BYP4.1 F5.1 J49.VBUS1 J49.VBUS2
V_USB5: BYP5.1 F6.1 J61.VBUS1 J61.VBUS2
VIN: C1.1 C2.+ C13.1 D3.C D5.C J4.9 R5.2 R10.2 U5.8 VIN_LED.2
VIN1: C15.1 C17.1 C18.+ D9.C D10.C J22.9 R15.2 R16.2 U1.8 VIN_LED1.2
VIN2: C30.1 C32.1 C33.+ D14.C D15.C J34.9 R24.2 R25.2 U2.8 VIN_LED2.2
VIN3: C45.1 C48.1 C49.+ D19.C D20.C J46.9 R33.2 R34.2 U3.8 VIN_LED3.2
VIN4: C61.1 C63.1 C64.+ D24.C D25.C J58.9 R42.2 R43.2 U4.8 VIN_LED4.2
VIN5: C76.1 C78.1 C79.+ D29.C D30.C J70.9 R51.2 R52.2 U6.8 VIN_LED5.2
VIN/1: J22.49 R14.2 R15.1
VIN/2: J34.49 R23.2 R24.1
VIN/3: J4.49 R9.2 R10.1
VIN/4: J46.49 R32.2 R33.1
VIN/5: J58.49 R41.2 R42.1
VIN/6: J70.49 R50.2 R51.1
VREG_3.3V: MEAS.1 MEAS.3 U5.1
VREG_3.3V1: MEAS1.1 MEAS1.3 U1.1
VREG_3.3V2: MEAS2.1 MEAS2.3 U2.1
VREG_3.3V3: MEAS3.1 MEAS3.3 U3.1
VREG_3.3V4: MEAS4.1 MEAS4.3 U4.1
VREG_3.3V5: MEAS5.1 MEAS5.3 U6.1

## Tracks (layer width: path | path; a pad name or v marks a point on that pad's centre or on a via)
3.3V  (via drill 0.3)
  Top 0.178: MEAS.2 MEAS.4